# Altium PCB AX301_AX4010.PcbDoc (part 1 of 10)
Units mil, origin at the board's own origin, x right, y up, seen from the top; angles counter-clockwise.
Board outline 5185 x 3614 mil, 4 copper layers (Top Layer, GND, Mid-Layer 1, Bottom Layer); 191 components, 338 nets, 1108 pads, 420 vias.
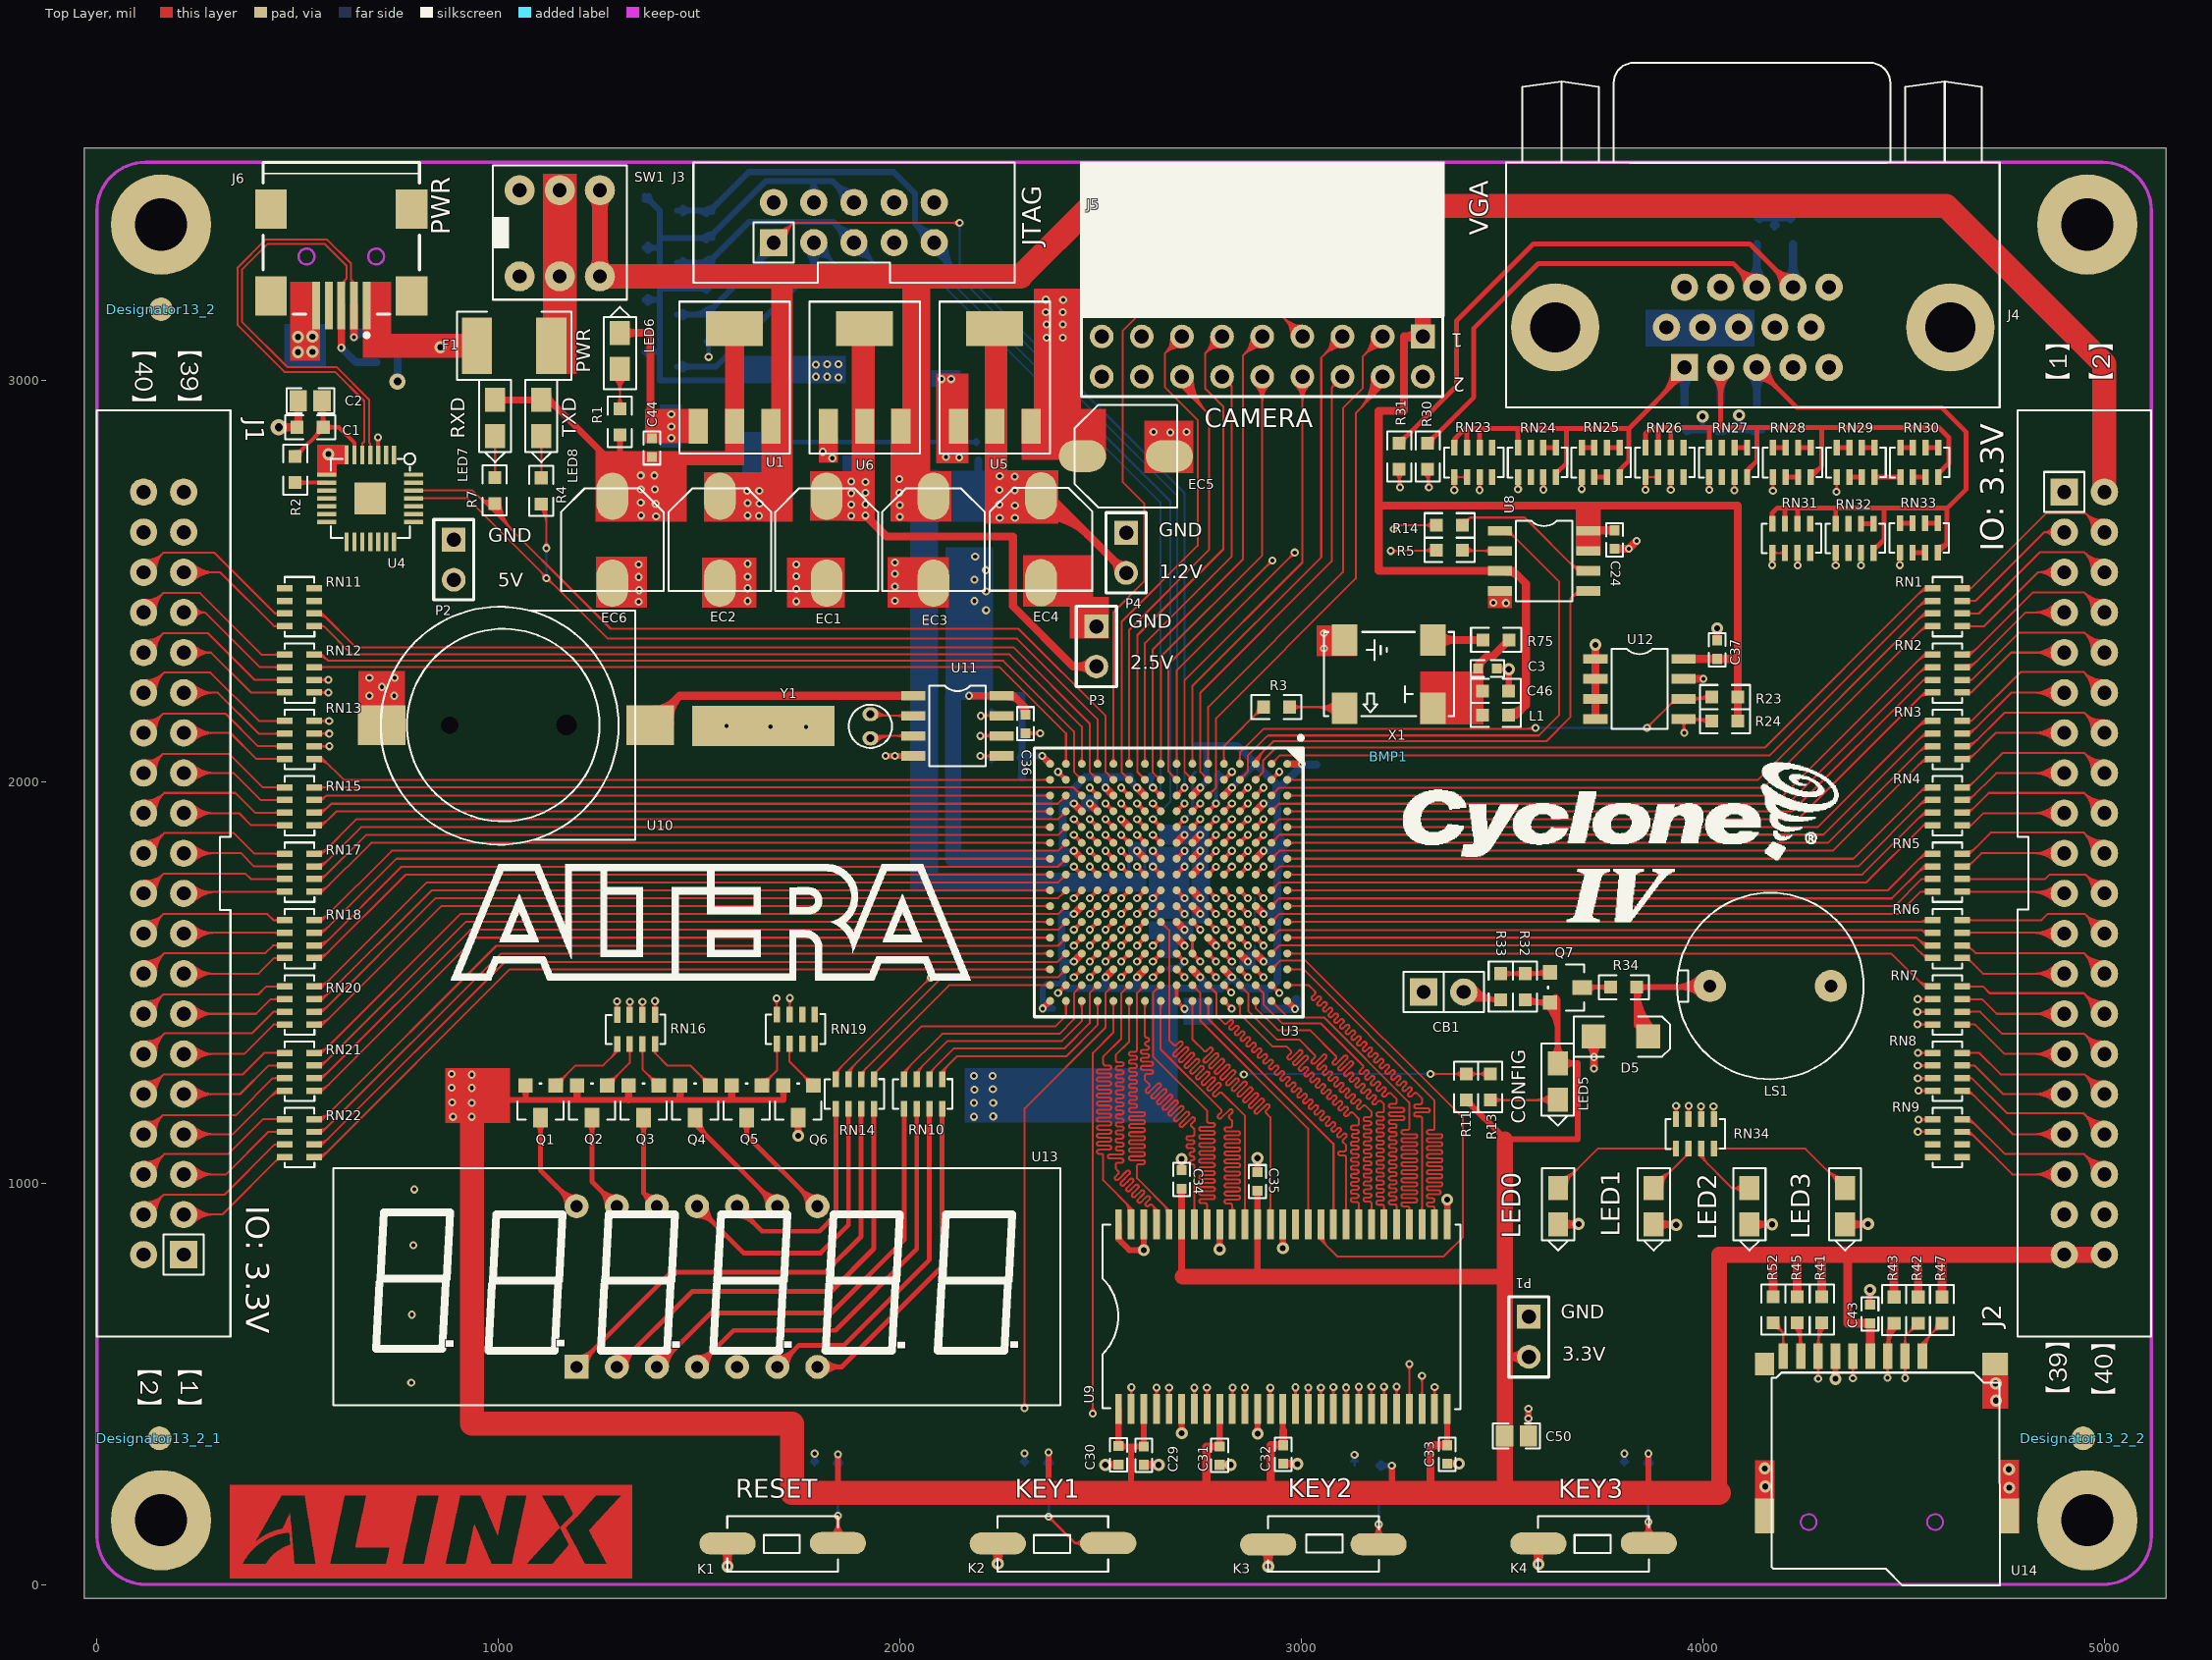
[diagram p0: Top Layer view]
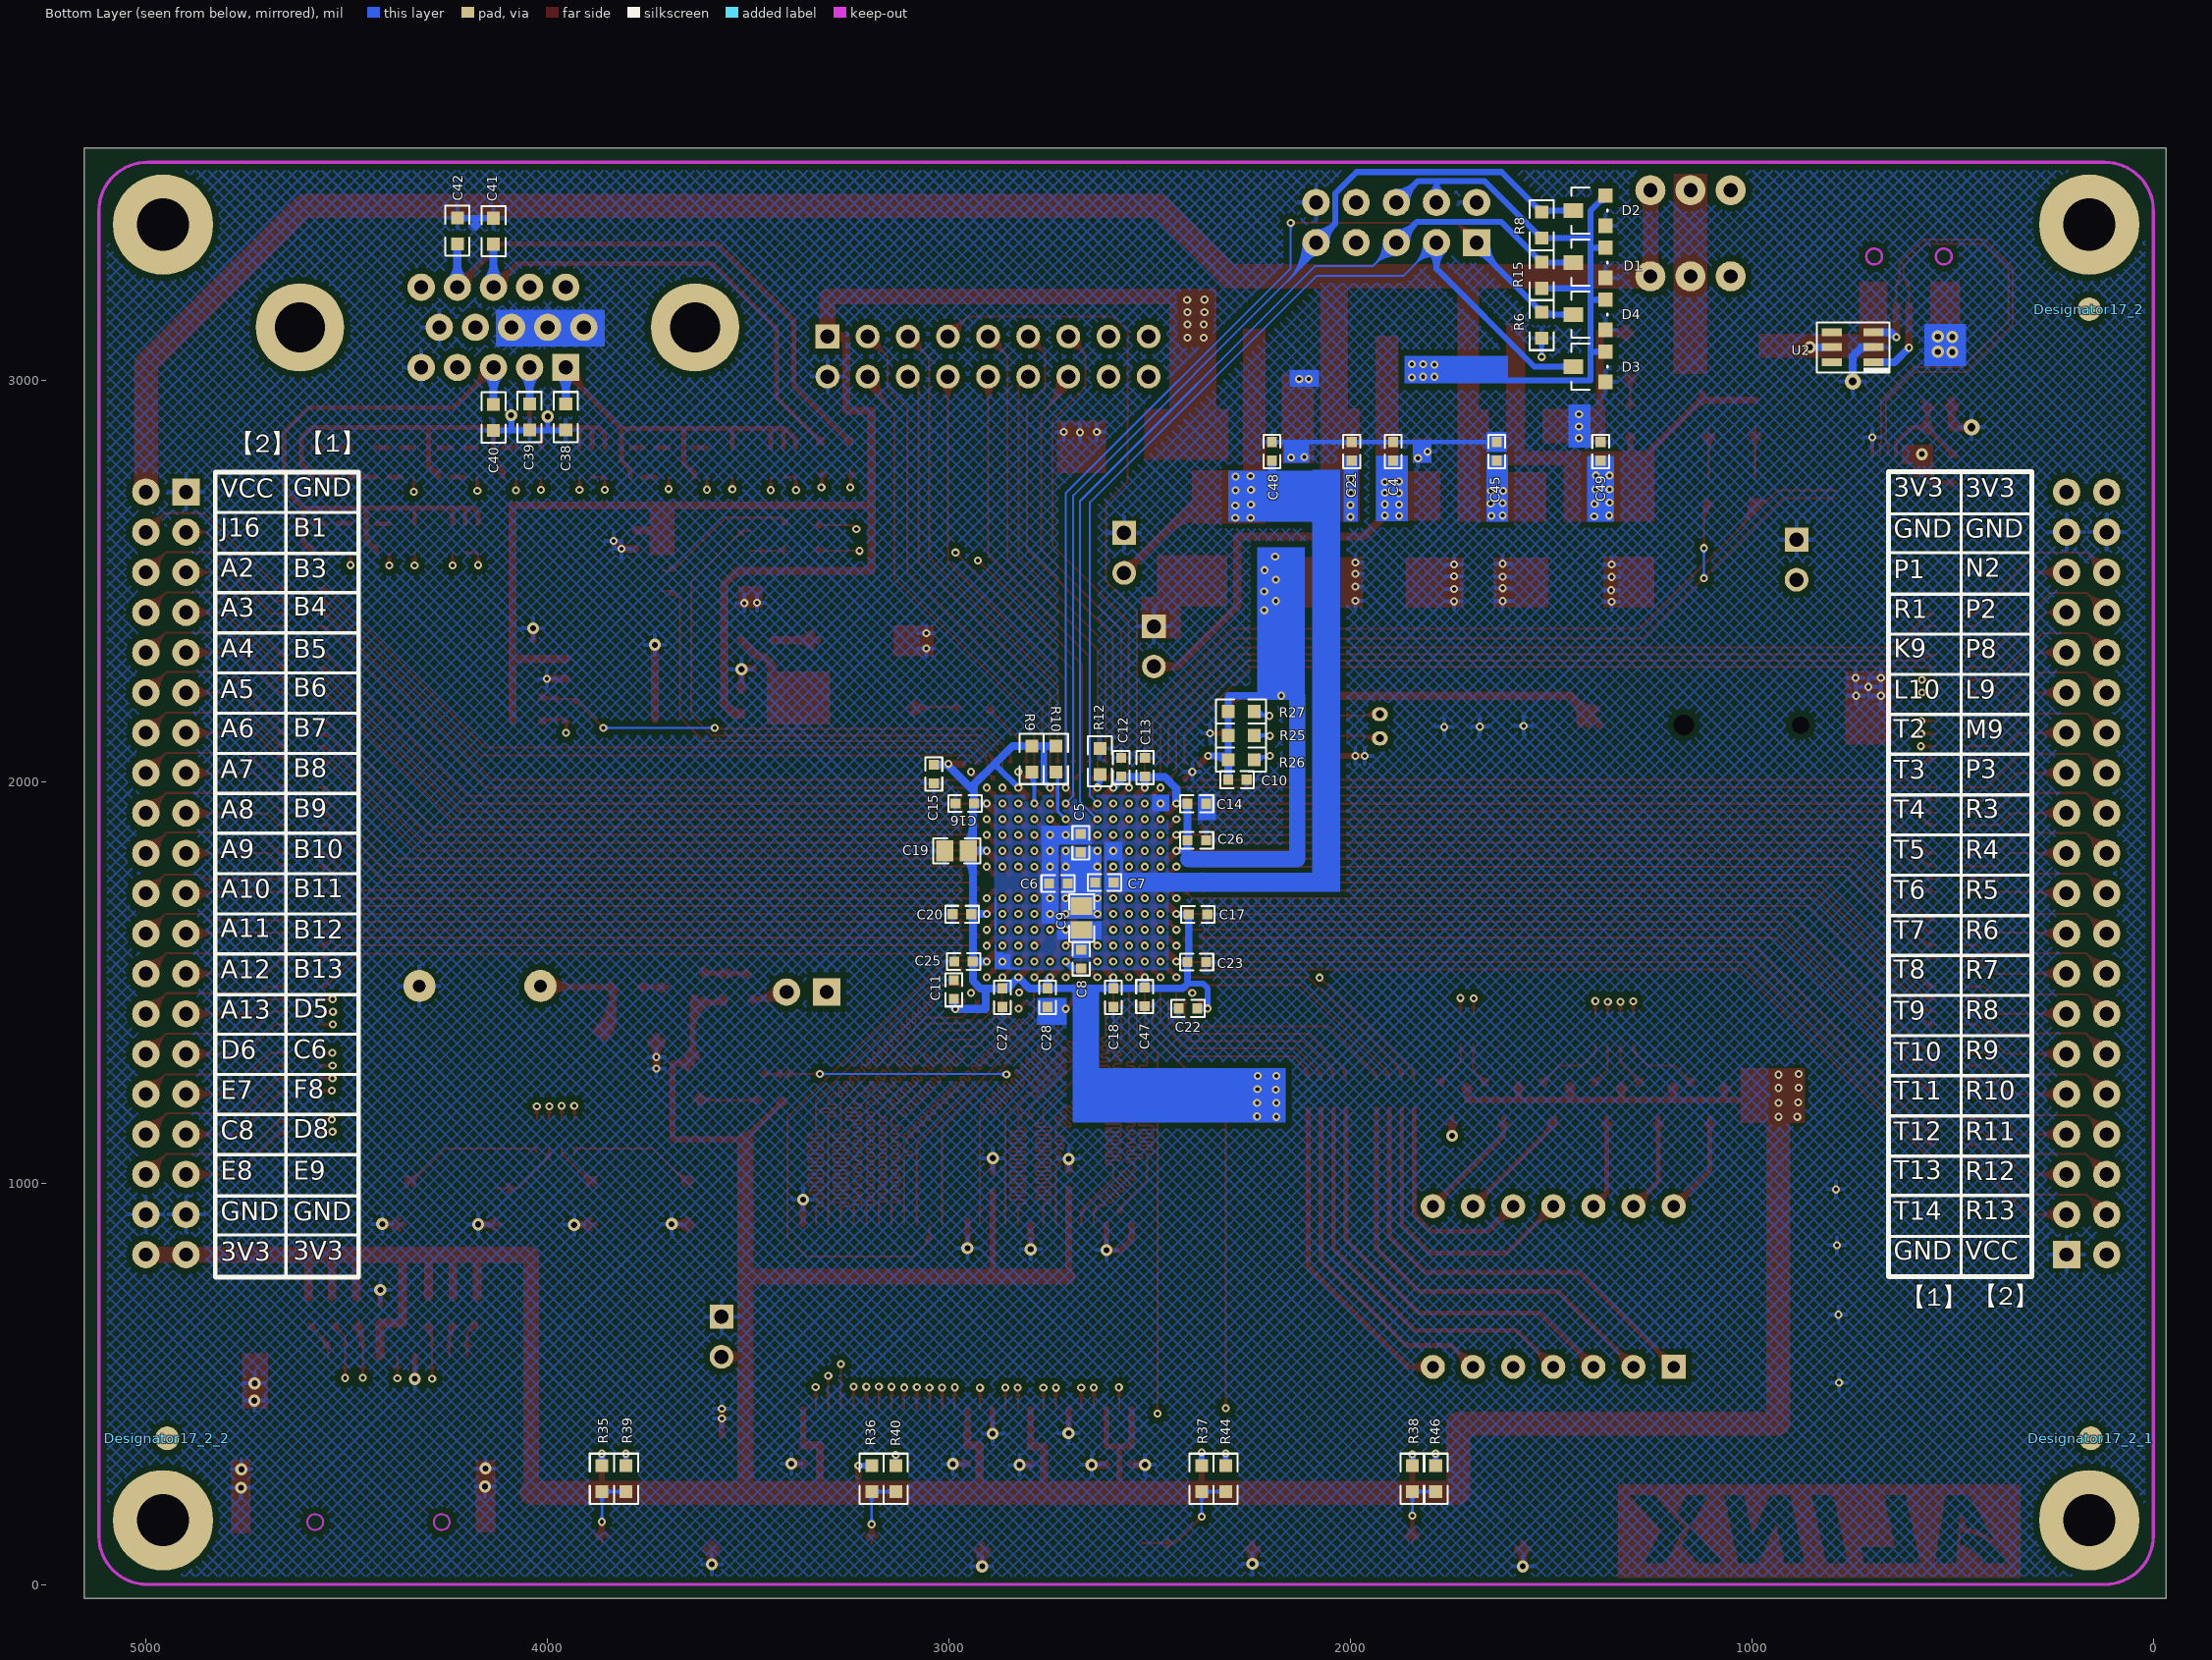
[diagram p1: Bottom Layer view, seen from below]
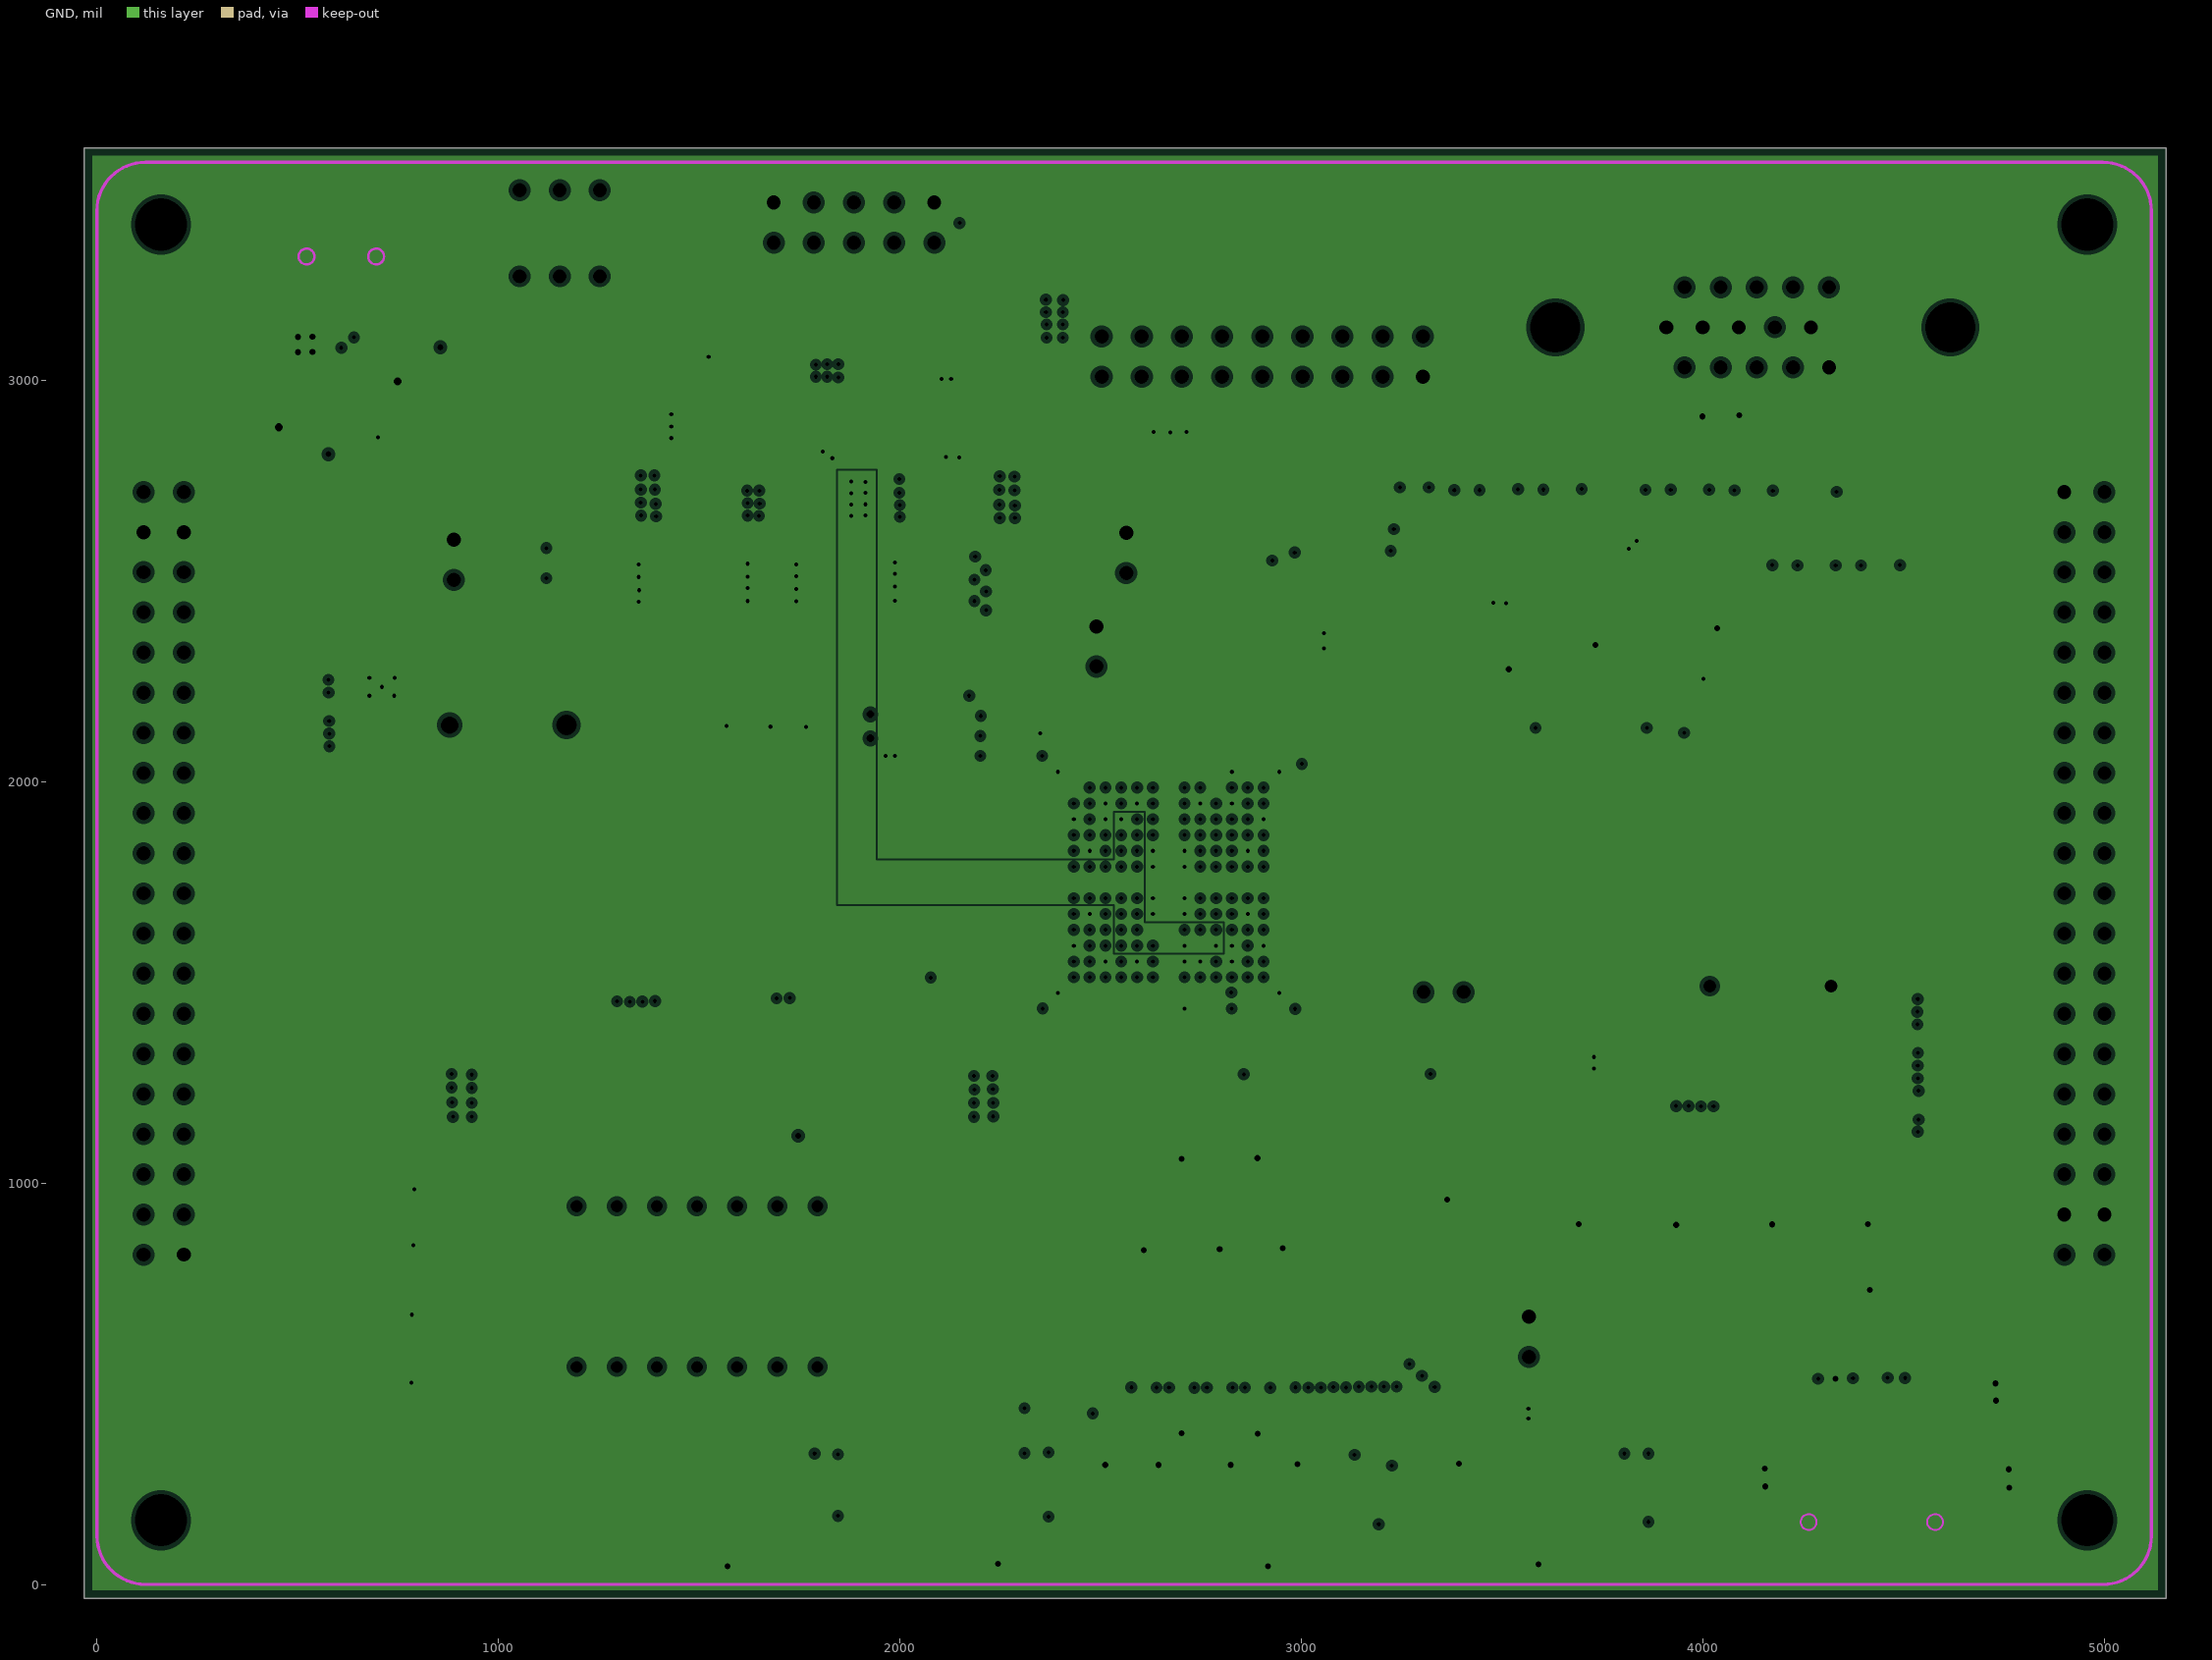
[diagram p2: GND, clearances drawn from the general rule]
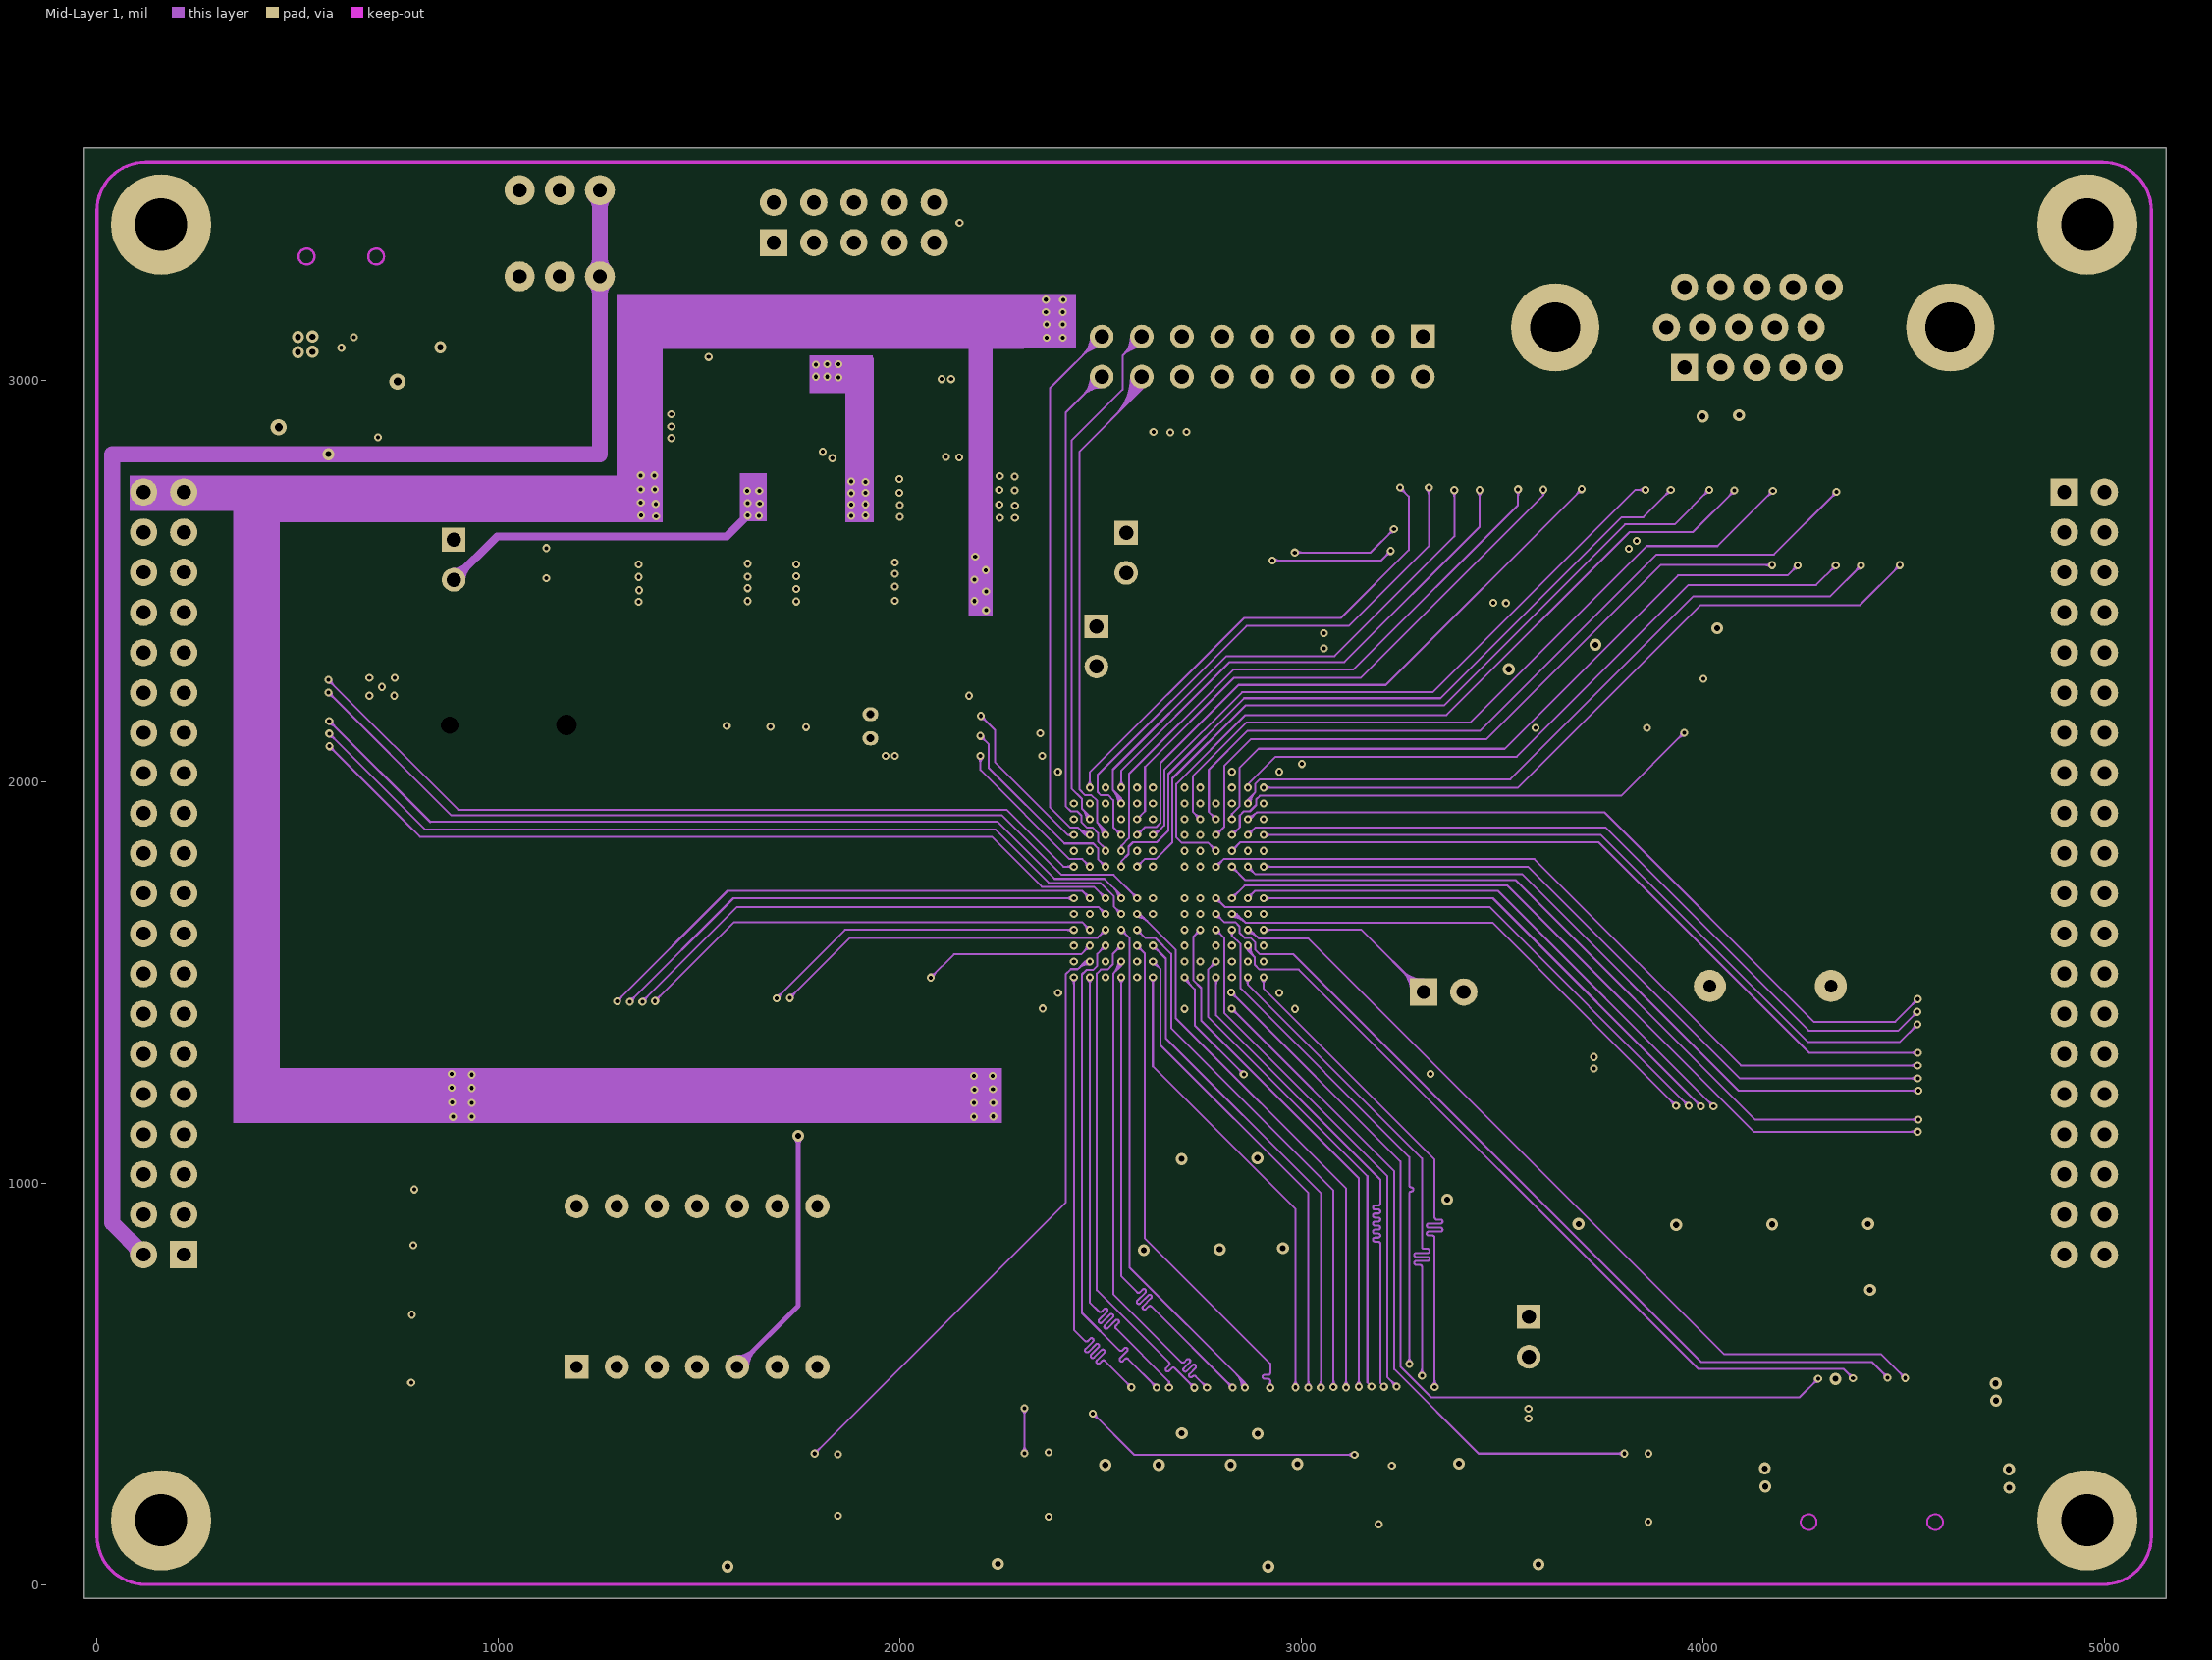
[diagram p3: Mid-Layer 1]

## Layer stack, top to bottom
Top Solder: solder mask 0.4, Solder Resist, Dk 3.5
Top Layer: signal copper 1.4
Dielectric1: core 12.6, FR-4, Dk 4.8
GND: plane copper 1.4, net (Multiple Nets)
Dielectric3: prepreg 12.6, FR-4, Dk 4.8
Mid-Layer 1: signal copper 1.4
Dielectric2: core 12.6, FR-4, Dk 4.8
Bottom Layer: signal copper 1.4
Bottom Solder: solder mask 0.4, Solder Resist, Dk 3.5

## Board outline
-31,3579.3 5154,3579.3 5154,3242.3 5154,-34.7 4892,-34.7 -31,-34.7 -31,3579.3

## Design rules (kind name [scope] priority, off if disabled: settings)
Clearance [All] p1: gap=5
ComponentClearance [All] p1 off: gap=10 collisioncheckmode=3 verticalgap=10 showdistances=FALSE
FanoutControl [InNet('GND')] p1: bgadir=Out bgaviamode=Centered fanoutstyle=Auto fanoutdirection=Alternating viagrid=1
FanoutControl Fanout_BGA [IsBGA] p2: bgadir=Out bgaviamode=Centered fanoutstyle=Auto fanoutdirection=Alternating viagrid=1 // Fanout_BGA (Default Rule)
FanoutControl Fanout_LCC [IsLCC] p3: bgadir=Out bgaviamode=Centered fanoutstyle=Auto fanoutdirection=Alternating viagrid=1 // Fanout_LCC (Default Rule)
FanoutControl Fanout_SOIC [IsSOIC] p4: bgadir=Out bgaviamode=Centered fanoutstyle=Auto fanoutdirection=Alternating viagrid=1 // Fanout_SOIC (Default Rule)
FanoutControl Fanout_Small [(CompPinCount < 5)] p5: bgadir=Out bgaviamode=Centered fanoutstyle=Auto fanoutdirection=OutThenIn viagrid=1 // Fanout_Small (Default Rule)
FanoutControl Fanout_Default [All] p6: bgadir=Out bgaviamode=Centered fanoutstyle=Auto fanoutdirection=Alternating viagrid=1 // Fanout_Default (Default Rule)
HoleSize [All] p1: absolutevalues=TRUE maxlimit=200 minlimit=1 maxpercent=80.000 minpercent=20.000
HoleToHoleClearance [All] p1 off: gap=10 allowstackedmicrovias=TRUE
LayerPairs [All] p1 off: enforce=TRUE
MatchedLengths SDRAM_DB [InNetClass('S_DB[0..15]')] p1: tolerance=50 checknetsindiffpair=TRUE checkdiffpairvsdiffpair=TRUE checkothers=TRUE
MatchedLengths SDRAM_A [InNetClass('S_A[0..12]')] p2: tolerance=50 checknetsindiffpair=TRUE checkdiffpairvsdiffpair=TRUE checkothers=TRUE
MinimumSolderMaskSliver [All] p1 off: minsoldermaskwidth=10
NetAntennae [All] p1 off: netantennaetolerance=0
PlaneClearance [All] p1: clearance=10
PlaneConnect [All] p1: planeconnectstyle=Relief reliefexpansion=6 reliefentries=4 reliefconductorwidth=5 reliefairgap=6
PolygonConnect [All] p1: connectstyle=Relief reliefconductorwidth=10 reliefentries=4 polygonreliefangle="90 Angle" airgapwidth=10
RoutingVias [All] p1: holewidth=10 width=20 viastyle="Through Hole" minholewidth=10 minwidth=20 maxholewidth=50 maxwidth=100
SilkToSilkClearance [All] p1 off: silktosilkclearance=10
SilkToSolderMaskClearance SilkscreenOverComponentPads [IsPad] p1 off: minsilkscreentomaskgap=10 clearancetoexposedcopper=TRUE
SolderMaskExpansion [All] p1: expansion=4
Width D2V5 [InNet('D2V5')] p1: maxlimit=60 minlimit=8 preferedwidth=20
Width D1V2 [InNet('D1V2')] p2: maxlimit=60 minlimit=6 preferedwidth=20
Width D3V3 [InNet('D3V3')] p3: maxlimit=60 minlimit=6 preferedwidth=20
Width GND [InNet('GND')] p4 off: maxlimit=60 minlimit=10 preferedwidth=20
Width [All] p5 off: maxlimit=60 minlimit=5 preferedwidth=5
15 further rules are at their usual default settings.

## Classes and differential pairs
net class S_DB[0..15]: S_DB0 S_DB1 S_DB2 S_DB3 S_DB4 S_DB5 S_DB6 S_DB7 S_DB8 S_DB9 S_DB10 S_DB11 S_DB12 S_DB13 S_DB14 S_DB15
net class S_A[0..12]: S_A0 S_A1 S_A2 S_A3 S_A4 S_A5 S_A6 S_A7 S_A8 S_A9 S_A10 S_A11 S_A12
component class 1_POWER: C1 C2 C4 C21 C44 C45 C48 C49 EC1 EC2 EC3 EC4 EC5 EC6 F1 J6 LED6 LED7 LED8 P1 P2 P3 P4 R1 R2 R4 R7 SW1 U1 U2 U4 U5 U6
component class 5_SDRAM: C29 C30 C31 C32 C33 C34 C35 C50 U9
component class 4_FPGA: C3 C5 C6 C7 C8 C9 C10 C11 C12 C13 C14 C15 C16 C17 C18 C19 C20 C22 C23 C24 C25 C26 C27 C28 C46 C47 D1 D2 D3 D4 J3 L1 LED5 R3 R5 R6 R8 R9 R10 R11 R12 R13 R14 R15 R75 U8 X1
component class 6_DIG: C36 C37 J2 LED0 LED1 LED2 LED3 Q1 Q2 Q3 Q4 Q5 Q6 R23 R24 R25 R26 R27 RN1 RN2 RN3 RN4 RN5 RN6 RN7 RN8 RN9 RN10 RN11 RN12 RN13 RN14 RN15 RN16 RN17 RN18 RN19 RN20 RN21 RN22 RN34 U10 U11 U12 U13 Y1
component class 7_VGA: C38 C39 C40 C41 C42 C43 CB1 D5 J4 J5 K1 K2 K3 K4 LS1 Q7 R30 R31 R32 R33 R34 R35 R36 R37 R38 R39 R40 R41 R42 R43 R44 R45 R46 R47 R52 RN23 RN24 RN25 RN26 RN27 RN28 RN29 RN30 RN31 RN32 RN33 U14
net class DIG[0..7]: DIG0 DIG1 DIG2 DIG3 DIG4 DIG5 DIG6 DIG7
net class SEL[0..5]: SEL0 SEL1 SEL2 SEL3 SEL4 SEL5
net class VGAD[15..0]: VGAD0 VGAD1 VGAD2 VGAD3 VGAD4 VGAD5 VGAD6 VGAD7 VGAD8 VGAD9 VGAD10 VGAD11 VGAD12 VGAD13 VGAD14 VGAD15
component class 2_FPGA: U3

## Components (designator, comment, footprint, x,y, rotation, side; value= is the part's Value field where it differs from the comment)
BMP1 "" BMP1 3217,2062 r0 top
C1 "1uF" 0603 564,2883 r180 top
C2 "10uF" 0805 561,2949 r180 top
C3 "0.1uF" 0402 3441,2282 r0 top
C4 "104" 0402 1894,2800 r90 bottom
C5 "10uF" 0805 2669.89,1631 r90 bottom
C6 "104" 0402 2590,1749 r0 bottom
C7 "104" 0402 2751,1746 r180 bottom
C8 "104" 0402 2671,1581 r270 bottom
C9 "104" 0402 2672,1870 r270 bottom
C10 "104" 0402 2305,2005 r180 bottom
C11 "104" 0402 2988,1459 r90 bottom
C12 "104" 0402 2571,2013 r90 bottom
C13 "104" 0402 2512,2013 r90 bottom
C14 "104" 0402 2406,1945 r180 bottom
C15 "104" 0402 3038,2042 r270 bottom
C16 "104" 0402 2938,1946 r0 bottom
C17 "104" 0402 2403,1669 r180 bottom
C18 "104" 0402 2591,1485 r270 bottom
C19 "10uF" 0805 2952,1827.74 r0 bottom
C20 "104" 0402 2945,1669.67 r0 bottom
C21 "104" 0402 1997,2800 r90 bottom
C22 "104" 0402 2382,1435 r0 bottom
C23 "104" 0402 2406,1551 r180 bottom
C24 "104" 0402 3781,2580 r90 top
C25 "104" 0402 2941,1552 r0 bottom
C26 "104" 0402 2406,1854 r180 bottom
C27 "104" 0402 2867,1485 r270 bottom
C28 "104" 0402 2755,1485 r270 bottom
C29 "104" 0402 2607.99,344.01 r270 top
C30 "104" 0402 2545,345 r270 top
C31 "104" 0402 2797,344 r270 top
C32 "104" 0402 2955,347 r270 top
C33 "104" 0402 3364,347 r270 top
C34 "104" 0402 2702,986 r90 top
C35 "104" 0402 2891,981 r90 top
C36 "104" 0402 2313,2167 r270 top
C37 "104" 0402 4036,2306 r90 top
C38 "5p1" 0603 3955,2941 r270 bottom
C39 "5p1" 0603 4045,2941 r270 bottom
C40 "5p1" 0603 4135,2940 r270 bottom
C41 "5p1" 0603 4135,3339 r90 bottom
C42 "5p1" 0603 4225,3340 r90 bottom
C43 "104" 0402 4417,651 r90 top
C44 "104" 0402 1383,2809 r90 top
C45 "104" 0402 1636,2800 r90 bottom
C46 "4.7uF" 0603 3452,2226 r0 top
C47 "104" 0402 2513,1487 r270 bottom
C48 "104" 0402 2196,2800 r90 bottom
C49 "104" 0402 1377,2800 r90 bottom
C50 "10uF" 0805 3507,370 r0 top
CB1 "BUZ" SIP2 3305,1476 r0 top
D1 "BAT54S" SOT23 1365,3255.33 r90 bottom
D2 "BAT54S" SOT23 1365,3385 r90 bottom
D3 "BAT54S" SOT23 1365,2996 r90 bottom
D4 "BAT54S" SOT23 1365,3125.67 r90 bottom
D5 "4148" 1206A 3729,1365 r0 top
Designator13_2 "Comment" TPS 160,3177 r0 top
Designator13_2_1 "Comment" TPS 156,364 r0 top
Designator13_2_2 "Comment" TPS 4948,364 r0 top
Designator17_2 "Comment" TPS 160,3177 r180 bottom
Designator17_2_1 "Comment" TPS 156,364 r180 bottom
Designator17_2_2 "Comment" TPS 4948,364 r180 bottom
EC1 "100uF/16V" AEC6.5 1818,2711 r270 top
EC2 "100uF/16V" AEC6.5 1552,2711 r270 top
EC3 "100uF/16V" AEC6.5 2084,2711 r270 top
EC4 "100uF/16V" AEC6.5 2352,2712 r270 top
EC5 "100uF/16V" AEC6.5 2455,2811 r0 top
EC6 "100uF/16V" AEC6.5 1284,2711 r270 top
F1 "Fuse" 1812 947,3086 r0 top
J1 "IDC40" IDC-40J 166.35,1771.65 r90 top (schematic designator J6)
J2 "IDC40" IDC-40J 4951,1771.65 r270 top
J3 "JTAG" JTAG-10 1686,3343 r0 top
J4 "VGA" VGA 3955,3032 r90 top
J5 "Header 9X2" HDR2X9 3303,3109.17 r180 top locked
J6 "EC2" MINIUSBB 609,3186.3 r270 top (schematic designator J1)
K1 "RESET" KEY735SO 1846,103 r180 top
K2 "KEY1" KEY735SO 2519.33,103 r180 top
K3 "KEY2" KEY735SO 2917.67,99.2 r0 top
K4 "KEY3" KEY735SO 3866,103 r180 top
L1 "Bead" 0603 3517,2166 r180 top
LED0 "LED0" LEDSO 3640,897 r90 top
LED1 "LED1" LEDso 3878.33,897 r90 top
LED2 "LED2" LEDSO 4116.67,897 r90 top
LED3 "LED3" LEDSO 4355,897 r90 top
LED5 "CONFIG" LEDSO 3639,1208 r90 top
LED6 "D3V3" LEDSO 1303,3118 r270 top
LED7 "RXD" LEDSO 992,2861 r90 top
LED8 "TXD" LEDSO 1107,2861 r90 top
LS1 "BUZZER" BUZZER 4018,1491 r0 top
P1 "3.3V" HDR1X2 3567,667 r270 top
P2 "5V" HDR1X2 889,2603 r270 top
P3 "3.3V" HDR1X2 2490,2387 r270 top
P4 "1.2V" HDR1X2 2564,2620 r270 top
Q1 "9012" SOT23 1143,1243 r180 top
Q2 "9012" SOT23 1271.4,1243 r180 top
Q3 "9012" SOT23 1399.8,1243 r180 top
Q4 "9012" SOT23 1528.2,1243 r180 top
Q5 "9012" SOT23 1656.6,1243 r180 top
Q6 "9012" SOT23 1785,1243 r180 top
Q7 "9012" SOT23 3620,1525 r270 top
R1 "1K" 0603 1303,2864 r90 top
R2 "10k" 0603 494,2745 r90 top
R3 "33R" 0603 2906,2186 r0 top
R4 "1K" 0603 1107,2692 r90 top
R5 "49.9" 0603 3337,2577 r0 top
R6 "1K" 0603 1524,3105 r90 bottom
R7 "1K" 0603 991,2693 r90 top
R8 "10K" 0603 1524,3354 r90 bottom
R9 "10K" 0603 2794,2089 r270 bottom
R10 "10K" 0603 2734,2089 r270 bottom
R11 "10K" 0603 3411,1207 r90 top
R12 "10K" 0603 2624,2018 r90 bottom
R13 "10K" 0603 3471,1272 r270 top
R14 "24.9" 0603 3337,2639 r0 top
R15 "10K" 0603 1524,3229 r90 bottom
R23 "4k7" 0603 4088,2211 r180 top
R24 "4k7" 0603 4088,2151 r180 top
R25 "10k" 0603 2305,2115 r180 bottom
R26 "10k" 0603 2305,2055 r180 bottom
R27 "10k" 0603 2305,2175 r180 bottom
R30 "22" 0603 3315,2843 r270 top
R31 "22" 0603 3244,2843 r270 top
R32 "1K" 0603 3558,1457 r90 top
R33 "2K2" 0603 3497,1457 r90 top
R34 "15" 0603 3771,1488 r0 top
R35 "10k" 0603 3865,296 r270 bottom
R36 "10k" 0603 3193,296 r270 bottom
R37 "10k" 0603 2371,296 r270 bottom
R38 "10k" 0603 1846,296 r270 bottom
R39 "100" 0603 3805,296 r270 bottom
R40 "100" 0603 3133,296 r270 bottom
R41 "1K" 0603 4297,717 r270 top
R42 "1K" 0603 4537,716 r270 top
R43 "1K" 0603 4477,716 r270 top
R44 "100" 0603 2311,296 r270 bottom
R45 "1K" 0603 4236,717 r270 top
R46 "100" 0603 1788,296 r270 bottom
R47 "1K" 0603 4596,716 r270 top
R52 "1K" 0603 4176,717 r270 top
R75 "10k" 0603 3453,2353 r0 top
RN1 "33R" RN-8P 4573,2482 r0 top
RN2 "33R" RN-8P 4573,2316.62 r0 top
RN3 "33R" RN-8P 4573,2151.25 r0 top
RN4 "33R" RN-8P 4573,1985.88 r0 top
RN5 "33R" RN-8P 4573,1820.5 r0 top
RN6 "33R" RN-8P 4573,1655.12 r0 top
RN7 "33R" RN-8P 4573,1489.75 r0 top
RN8 "33R" RN-8P 4573,1324.38 r0 top
RN9 "33R" RN-8P 4573,1159 r0 top
RN10 "470" RN-8P 2011,1185 r90 top
RN11 "33R" RN-8P 468,2482 r0 top
RN12 "33R" RN-8P 468,2316.62 r0 top
RN13 "33R" RN-8P 468,2151.25 r0 top
RN14 "470" RN-8P 1841,1185 r90 top
RN15 "33R" RN-8P 468,1985.88 r0 top
RN16 "470" RN-8P 1296,1346 r90 top
RN17 "33R" RN-8P 468,1820.5 r0 top
RN18 "33R" RN-8P 468,1655.12 r0 top
RN19 "470" RN-8P 1694,1347 r90 top
RN20 "33R" RN-8P 468,1489.75 r0 top
RN21 "33R" RN-8P 468,1324.38 r0 top
RN22 "33R" RN-8P 468,1159 r0 top
RN23 "1K" RN-8P 3476,2832 r270 top
RN24 "2K" RN-8P 3634.71,2832 r270 top
RN25 "2K" RN-8P 3793.43,2832 r270 top
RN26 "1K" RN-8P 3952.14,2832 r270 top
RN27 "2K" RN-8P 4110.86,2832 r270 top
RN28 "2K" RN-8P 4269.57,2832 r270 top
RN29 "2K" RN-8P 4428.29,2832 r270 top
RN30 "2K" RN-8P 4587,2832 r270 top
RN31 "1K" RN-8P 4268,2643 r270 top
RN32 "2K" RN-8P 4426,2643 r270 top
RN33 "2K" RN-8P 4586,2644 r270 top
RN34 "470" RN-8P 4028,1159 r270 top
SW1 "SW" KEY_DPDT 1053,3259 r90 top
U1 "1117-3.3" SOT223 1498,2885 r0 top
U2 "SRV05-4" SOT23-6 697,3045 r90 bottom
U3 "EP4CE6F17C8" FBGA256 2670,1749 r270 top locked
U4 "CP2102" QFN28 740,2814 r270 top
U5 "1117-1.2" SOT223 2146,2885 r0 top
U6 "1117-2.5" SOT223 1822,2885 r0 top
U8 "M25P16-VMN3PB" SO8 3495,2625 r0 top
U9 "HY57V2562GTR" TSOP-54 2545,437 r180 top
U10 "battery" BATSO 1418,2141 r0 top
U11 "DS1302" SO8 2034,2214 r0 top
U12 "24LC04" SO8 3733,2306 r0 top
U13 "HEX6" NIX_6 1195,542 r0 top locked
U14 "SD" TF 4459,370 r90 top locked
X1 "50M" CY_4 3328,2183 r0 top
Y1 "32.768kHz" CY_SMALL 1927,2168 r270 top

## Footprints (in the part's own frame and the unit in brackets; to place one, negate y for a bottom-side part, rotate by r counter-clockwise, add the part's x,y. Pads: shape width x height; smd on the part's side, far side on the other; paste and mask are expansions set on the pad)
0402 [mil]
  rect 25x25 smd: 1(0,0) 2(46.24,0)
  silkscreen extent -19,-21 64,21
0603 [mil]
  rect 32x32 smd: 1(0,0) 2(65,0)
  silkscreen extent -30,-30 95,30
0805 [mm]
  rect 1.1x1.36 smd: 1(0,0) 2(1.5,0)
  silkscreen extent -0.76,-0.79 2.24,0.79
1206A [mil]
  rect 60x60 smd: 1(0,0) 2(135,0)
  silkscreen extent -50,-50 190,50
1812 [mil]
  rect 75x140 smd: 1(0,0) 2(185,0)
  silkscreen extent -50,-85 235,85
AEC6.5 [mm]
  oval 3x2 smd: 1(0,0) 2(5.5,0)
  silkscreen extent -0.5,-3.25 6,3.25
BATSO [mm]
  round 1 hole 1.1: 0(-13.7,0)
  round 1 hole 1.3: 0(-6.3,0)
  rect 3x2.5 smd: 1(-1,0) 2(-18,0)
  silkscreen extent -18.06,-7.57 -1.95,7.48
BMP1 [mil]
  silkscreen extent 38,-410 1122,-14
BUZZER [mil]
  round 80 hole 32: 1(0,0) 2(301.57,0)
  silkscreen extent -81,-232 383,232
CY_4 [mm]
  rect 1.6x2 smd: 1(0,4.318) 2(-5.588,4.318) 3(-5.588,0) 4(0,0)
  silkscreen extent -6.88,-0.51 1.35,4.83
CY_SMALL [mil]
  rect 100x354.33 smd: 0(29,-267)
  oval 35x40 hole 20: 1(0,0) 2(60,0)
  silkscreen extent -24,-54 84,54
FBGA256 [mm] "BGA, 256-Leads, Body 17x17mm, Pitch 1mm"
  round 0.5 smd: A1(-7.5,7.5) A2(-6.5,7.5) A3(-5.5,7.5) A4(-4.5,7.5) A5(-3.5,7.5) A6(-2.5,7.5) A7(-1.5,7.5) A8(-0.5,7.5) A9(0.5,7.5) A10(1.5,7.5) A11(2.5,7.5) A12(3.5,7.5) A13(4.5,7.5) A14(5.5,7.5) A15(6.5,7.5) A16(7.5,7.5) B1(-7.5,6.5) B2(-6.5,6.5) B3(-5.5,6.5) B4(-4.5,6.5) B5(-3.5,6.5) B6(-2.5,6.5) B7(-1.5,6.5) B8(-0.5,6.5) B9(0.5,6.5) B10(1.5,6.5) B11(2.5,6.5) B12(3.5,6.5) B13(4.5,6.5) B14(5.5,6.5) B15(6.5,6.5) B16(7.5,6.5) C1(-7.5,5.5) C2(-6.5,5.5) C3(-5.5,5.5) C4(-4.5,5.5) C5(-3.5,5.5) C6(-2.5,5.5) C7(-1.5,5.5) C8(-0.5,5.5) C9(0.5,5.5) C10(1.5,5.5) C11(2.5,5.5) C12(3.5,5.5) C13(4.5,5.5) C14(5.5,5.5) C15(6.5,5.5) C16(7.5,5.5) D1(-7.5,4.5) D2(-6.5,4.5) D3(-5.5,4.5) D4(-4.5,4.5) D5(-3.5,4.5) D6(-2.5,4.5) D7(-1.5,4.5) D8(-0.5,4.5) D9(0.5,4.5) D10(1.5,4.5) D11(2.5,4.5) D12(3.5,4.5) D13(4.5,4.5) D14(5.5,4.5) D15(6.5,4.5) D16(7.5,4.5) E1(-7.5,3.5) E2(-6.5,3.5) E3(-5.5,3.5) E4(-4.5,3.5) E5(-3.5,3.5) E6(-2.5,3.5) E7(-1.5,3.5) E8(-0.5,3.5) E9(0.5,3.5) E10(1.5,3.5) E11(2.5,3.5) E12(3.5,3.5) E13(4.5,3.5) E14(5.5,3.5) E15(6.5,3.5) E16(7.5,3.5) F1(-7.5,2.5) F2(-6.5,2.5) F3(-5.5,2.5) F4(-4.5,2.5) F5(-3.5,2.5) F6(-2.5,2.5) F7(-1.5,2.5) F8(-0.5,2.5) F9(0.5,2.5) F10(1.5,2.5) F11(2.5,2.5) F12(3.5,2.5) F13(4.5,2.5) F14(5.5,2.5) F15(6.5,2.5) F16(7.5,2.5) G1(-7.5,1.5) G2(-6.5,1.5) G3(-5.5,1.5) G4(-4.5,1.5) G5(-3.5,1.5) G6(-2.5,1.5) G7(-1.5,1.5) G8(-0.5,1.5) G9(0.5,1.5) G10(1.5,1.5) G11(2.5,1.5) G12(3.5,1.5) G13(4.5,1.5) G14(5.5,1.5) G15(6.5,1.5) G16(7.5,1.5) H1(-7.5,0.5) H2(-6.5,0.5) H3(-5.5,0.5) H4(-4.5,0.5) H5(-3.5,0.5) H6(-2.5,0.5) H7(-1.5,0.5) H8(-0.5,0.5) H9(0.5,0.5) H10(1.5,0.5) H11(2.5,0.5) H12(3.5,0.5) H13(4.5,0.5) H14(5.5,0.5) H15(6.5,0.5) H16(7.5,0.5) J1(-7.5,-0.5) J2(-6.5,-0.5) J3(-5.5,-0.5) J4(-4.5,-0.5) J5(-3.5,-0.5) J6(-2.5,-0.5) J7(-1.5,-0.5) J8(-0.5,-0.5) J9(0.5,-0.5) J10(1.5,-0.5) J11(2.5,-0.5) J12(3.5,-0.5) J13(4.5,-0.5) J14(5.5,-0.5) J15(6.5,-0.5) J16(7.5,-0.5) K1(-7.5,-1.5) K2(-6.5,-1.5) K3(-5.5,-1.5) K4(-4.5,-1.5) K5(-3.5,-1.5) K6(-2.5,-1.5) K7(-1.5,-1.5) K8(-0.5,-1.5) K9(0.5,-1.5) K10(1.5,-1.5) K11(2.5,-1.5) K12(3.5,-1.5) K13(4.5,-1.5) K14(5.5,-1.5) K15(6.5,-1.5) K16(7.5,-1.5) L1(-7.5,-2.5) L2(-6.5,-2.5) L3(-5.5,-2.5) L4(-4.5,-2.5) L5(-3.5,-2.5) L6(-2.5,-2.5) L7(-1.5,-2.5) L8(-0.5,-2.5) L9(0.5,-2.5) L10(1.5,-2.5) L11(2.5,-2.5) L12(3.5,-2.5) L13(4.5,-2.5) L14(5.5,-2.5) L15(6.5,-2.5) L16(7.5,-2.5) M1(-7.5,-3.5) M2(-6.5,-3.5) M3(-5.5,-3.5) M4(-4.5,-3.5) M5(-3.5,-3.5) M6(-2.5,-3.5) M7(-1.5,-3.5) M8(-0.5,-3.5) M9(0.5,-3.5) M10(1.5,-3.5) M11(2.5,-3.5) M12(3.5,-3.5) M13(4.5,-3.5) M14(5.5,-3.5) M15(6.5,-3.5) M16(7.5,-3.5) N1(-7.5,-4.5) N2(-6.5,-4.5) N3(-5.5,-4.5) N4(-4.5,-4.5) N5(-3.5,-4.5) N6(-2.5,-4.5) N7(-1.5,-4.5) N8(-0.5,-4.5) N9(0.5,-4.5) N10(1.5,-4.5) N11(2.5,-4.5) N12(3.5,-4.5) N13(4.5,-4.5) N14(5.5,-4.5) N15(6.5,-4.5) N16(7.5,-4.5) P1(-7.5,-5.5) P2(-6.5,-5.5) P3(-5.5,-5.5) P4(-4.5,-5.5) P5(-3.5,-5.5) P6(-2.5,-5.5) P7(-1.5,-5.5) P8(-0.5,-5.5) P9(0.5,-5.5) P10(1.5,-5.5) P11(2.5,-5.5) P12(3.5,-5.5) P13(4.5,-5.5) P14(5.5,-5.5) P15(6.5,-5.5) P16(7.5,-5.5) R1(-7.5,-6.5) R2(-6.5,-6.5) R3(-5.5,-6.5) R4(-4.5,-6.5) R5(-3.5,-6.5) R6(-2.5,-6.5) R7(-1.5,-6.5) R8(-0.5,-6.5) R9(0.5,-6.5) R10(1.5,-6.5) R11(2.5,-6.5) R12(3.5,-6.5) R13(4.5,-6.5) R14(5.5,-6.5) R15(6.5,-6.5) R16(7.5,-6.5) T1(-7.5,-7.5) T2(-6.5,-7.5) T3(-5.5,-7.5) T4(-4.5,-7.5) T5(-3.5,-7.5) T6(-2.5,-7.5) T7(-1.5,-7.5) T8(-0.5,-7.5) T9(0.5,-7.5) T10(1.5,-7.5) T11(2.5,-7.5) T12(3.5,-7.5) T13(4.5,-7.5) T14(5.5,-7.5) T15(6.5,-7.5) T16(7.5,-7.5)
  silkscreen extent -9.27,-8.5 8.5,8.5, body extent -8.5,-8.5 8.5,8.5, height 2.2
HDR1X2 [mm] "Connector; Header; 2 Position"
  rect 1.5x1.5 hole 0.9: 1(0,0)
  round 1.5 hole 0.9: 2(2.54,0)
  silkscreen extent -1.27,-1.27 3.81,1.27
HDR2X9 [mm] "Connector; Header; 9x2 Position"
  rect 1.5x1.5 hole 0.9: 1(0,0)
  round 1.5 hole 0.9: 2(0,2.54) 3(2.54,0) 4(2.54,2.54) 5(5.08,0) 6(5.08,2.54) 7(7.62,0) 8(7.62,2.54) 9(10.16,0) 10(10.16,2.54) 11(12.7,0) 12(12.7,2.54) 13(15.24,0) 14(15.24,2.54) 15(17.78,0) 16(17.78,2.54) 17(20.32,0) 18(20.32,2.54)
  silkscreen extent -1.27,-1.27 21.59,3.81
IDC-40J [mil]
  rect 68x68 hole 35: 1(-950,-50)
  round 68 hole 35: 2(-950,50) 3(-850,-50) 4(-850,50) 5(-750,-50) 6(-750,50) 7(-650,-50) 8(-650,50) 9(-550,-50) 10(-550,50) 11(-450,-50) 12(-450,50) 13(-350,-50) 14(-350,50) 15(-250,-50) 16(-250,50) 17(-150,-50) 18(-150,50) 19(-50,-50) 20(-50,50) 21(50,-50) 22(50,50) 23(150,-50) 24(150,50) 25(250,-50) 26(250,50) 27(350,-50) 28(350,50) 29(450,-50) 30(450,50) 31(550,-50) 32(550,50) 33(650,-50) 34(650,50) 35(750,-50) 36(750,50) 37(850,-50) 38(850,50) 39(950,-50) 40(950,50)
  silkscreen extent -1154,-167 1154,167
JTAG-10 [mil]
  rect 68x68 hole 35: 1(0,0)
  round 68 hole 35: 2(0,100) 3(100,0) 4(100,100) 5(200,0) 6(200,100) 7(300,0) 8(300,100) 9(400,0) 10(400,100)
  silkscreen extent -200,-100 600,200
KEY735SO [mil]
  oval 140x55.12 smd: 1(0,0) 2(275,1)
  silkscreen extent 0,-67 276,71
KEY_DPDT [mil]
  round 75 hole 35: 1(0,0) 2(0,-100) 3(0,-200) 4(214.57,0) 5(214.57,-100) 6(214.57,-200)
  silkscreen extent -58,-268 277,68
LEDSO [mil]
  rect 60x50 smd: 1(90,0) 2(0,0)
  silkscreen extent -65,-40 140,40
LEDso [mil]
  rect 60x50 smd: 1(90,0) 2(0,0)
  silkscreen extent -65,-40 140,40
MINIUSBB [mm]
  rect 3x0.5 smd: 1(0,1.6) 2(0,0.8) 3(0,0) 4(0,-0.8) 5(0,-1.6)
  rect 2.5x2 smd: 6(-0.6,-4.45) 7(-6.1,-4.45) 8(-0.6,4.45) 9(-6.1,4.45)
  Keep-Out Layer circle w0.152: c-3.1,2.2 r0.5
  Keep-Out Layer circle w0.152: c-3.1,-2.2 r0.5
  silkscreen extent -9.05,-4.95 2,4.95
NIX_6 [mil]
  rect 60x60 hole 30: 1(0,0)
  round 60 hole 30: 2(100,0) 3(200,0) 4(300,0) 5(400,0) 6(500,0) 7(600,0) 8(600,400) 9(500,400) 10(400,400) 11(300,400) 12(200,400) 13(100,400) 14(0,400)
  silkscreen extent -606,-95 1206,495
QFN28 [mm]
  rect 2x2 smd: 0(2.75,-1.5)
  rect 1.2x0.27 smd: 1(0,0) 2(0,-0.5) 3(0,-1) 4(0,-1.5) 5(0,-2) 6(0,-2.5) 7(0,-3) 15(5.5,-3) 16(5.5,-2.5) 17(5.5,-2) 18(5.5,-1.5) 19(5.5,-1) 20(5.5,-0.5) 21(5.5,0)
  rect 0.27x1.2 smd: 8(1.25,-4.25) 9(1.75,-4.25) 10(2.25,-4.25) 11(2.75,-4.25) 12(3.25,-4.25) 13(3.75,-4.25) 14(4.25,-4.25) 22(4.25,1.25) 23(3.75,1.25) 24(3.25,1.25) 25(2.75,1.25) 26(2.25,1.25) 27(1.75,1.25) 28(1.25,1.25)
  silkscreen extent -0.1,-4 5.25,1.35
RN-8P [mm]
  rect 1x0.4 smd: 1(0,0) 2(0,-0.8) 3(0,-1.6) 4(0,-2.4) 5(1.858,-2.4) 6(1.858,-1.6) 7(1.858,-0.8) 8(1.858,0)
  silkscreen extent 0,-3.05 1.88,0.71
SIP2 [mil]
  rect 68x68 hole 35: 1(0,0)
  round 68 hole 35: 2(100,0)
  silkscreen extent -50,-50 150,50
SO8 [mil]
  rect 60x24 smd: 1(0,0) 2(0,-50) 3(0,-100) 4(0,-150) 5(220,-150) 6(220,-100) 7(220,-50) 8(220,0)
  silkscreen extent 40,-175 180,25
SOT23 [mil]
  rect 36x36 smd: 1(0,0) 2(75,0)
  rect 36x50 smd: 3(38,80)
  silkscreen extent -20,-5 95,85
SOT23-6 [mm]
  rect 0.5x1.27 smd: 1(0,0) 2(0.95,0) 3(1.905,0) 4(1.905,2.642) 5(0.95,2.642) 6(0,2.642)
  silkscreen extent -0.66,-0.99 2.51,3.61
SOT223 [mm]
  rect 1.2x2.2 smd: 1(0,0) 2(2.3,0) 3(4.6,0)
  rect 3.6x2.2 smd: 4(2.3,6.2)
  silkscreen extent -1.2,-1.7 5.8,7.9
TF [mm]
  rect 1.6x0.6 smd: 1(5.05,-2.25) 2(5.05,-1.15) 3(5.05,-0.05) 4(5.05,1.05) 5(5.05,2.15) 6(5.05,3.25) 7(5.05,4.35) 8(5.05,5.45) 9(5.05,6.55)
  rect 1.4x1.2 smd: 10(4.55,7.75)
  rect 2.2x1.2 smd: 11(-5.05,7.75) 12(-5.05,-7.75)
  rect 1.4x1.6 smd: 13(4.55,-6.85)
  Keep-Out Layer circle w0.127: c-5.45,4.951 r0.5
  Keep-Out Layer circle w0.127: c-5.45,-3.05 r0.5
  silkscreen extent -9.47,-7.15 4.01,7.29
TPS [mm]
  round 1.5 smd mask+0.5: 1(0,0)
TSOP-54 [mil]
  rect 17x75 smd: 1(0,0) 2(-31.5,0) 3(-62.99,0) 4(-94.49,0) 5(-125.98,0) 6(-157.48,0) 7(-188.98,0) 8(-220.47,0) 9(-251.97,0) 10(-283.46,0) 11(-314.99,0) 12(-346.46,0) 13(-377.95,0) 14(-409.45,0) 15(-440.94,0) 16(-472.44,0) 17(-503.94,0) 18(-535.43,0) 19(-566.93,0) 20(-598.43,0) 21(-629.92,0) 22(-661.42,0) 23(-692.91,0) 24(-724.41,0) 25(-755.91,0) 26(-787.4,0) 27(-818.9,0) 28(-818.9,-460) 29(-787.4,-460) 30(-755.91,-460) 31(-724.41,-460) 32(-692.91,-460) 33(-661.42,-460) 34(-630,-460) 35(-598.43,-460) 36(-566.93,-460) 37(-535.43,-460) 38(-503.94,-460) 39(-472.44,-460) 40(-440.94,-460) 41(-409.45,-460) 42(-377.95,-460) 43(-346.46,-460) 44(-314.99,-460) 45(-283.46,-460) 46(-251.97,-460) 47(-220.47,-460) 48(-188.98,-460) 49(-157.48,-460) 50(-125.98,-460) 51(-94.49,-460) 52(-62.99,-460) 53(-31.5,-460) 54(0,-460)
  silkscreen extent -852,-460 40,0
VGA [mil]
  rect 68x68 hole 35: 1(0,0)
  round 68 hole 35: 2(0,-90) 3(0,-180) 4(0,-270) 5(0,-360) 6(100,45) 7(100,-45) 8(100,-135) 9(100,-225) 10(100,-315) 11(200,0) 12(200,-90) 13(200,-180) 14(200,-270) 15(200,-360)
  round 220 hole 125: 16(100,-662) 17(100,322)
  silkscreen extent -100,-785 759,445

## Part data
C1 C2 C3 C5 C19 C46 C50: library part "CAP NP_Dup2"
C4 C6 C7 C8 C9 C10 C11 C12 C13 C14 C15 C16 C17 C18 C20 C21 C22 C23 C24 C25 C26 C27 C28 C37 C44 C45 C47 C48 C49: library part C_Dup4
C29 C30 C31 C32 C33 C34 C35: library part C_Dup2
C36: library part C_Dup3
C38 C39 C40 C41 C42 C43: library part C_Dup1
CB1: library part "Circuit Breaker", "Circuit Breaker"
D1 D2 D3 D4: library part BAV99
EC1 EC2 EC3 EC4 EC5 EC6: library part EC
F1: library part "Fuse 2"
J1 J2: library part MHDR2X20, "Header, 20-Pin, Dual row"
J3: library part JTAG-10_Dup1
J4: library part "Connector 15", "Receptacle Assembly, 15-Pin, Sim Line Connector"
J5: "Header, 9-Pin, Dual row"
J6: library part MiniUSBB
K1 K2 K3 K4: library part KEYB
L1: library part INDUCTOR
LED0 LED1 LED2 LED3 LED5 LED6: library part LED_Dup1
LED7 LED8: library part LED
LS1: library part SPEAKER
P1 P2 P3 P4: library part "Header 2", "Header, 2-Pin"
Q1 Q2 Q3 Q4 Q5 Q6 Q7: library part PNP
R1 R30 R31 R41 R42 R43 R45 R47 R52: library part R
R2 R3 R75: library part RESISTOR
R4 R5 R7 R9 R10 R11 R12 R14 R32 R33 R34: library part R_Dup3
R6 R8 R15 R35 R36 R37 R38 R39 R40 R44 R46: library part R_Dup2
R13: library part R_Dup1
R23 R24: library part R_Dup6
R25 R26 R27: library part R_Dup5
RN1 RN2 RN3 RN4 RN5 RN6 RN7 RN8 RN9 RN11 RN12 RN13 RN15 RN17 RN18 RN20 RN21 RN22 RN23 RN24 RN25 RN26 RN27 RN28 RN29 RN30 RN31 RN32 RN33: library part RN_Dup1
RN10 RN14 RN16 RN19 RN34: library part RN
SW1: library part "SW KEY-DPDT"
U3: "Cyclone IV Family FPGA, 2V Core, 179 I/O Pins, 2 PLLs, 256-Pin FBGA, Speed Grade 8, Commercial Grade"
U4: library part CP2102_0
U5 U6: library part 1117-3.3
U8: "16 Mb (x1) Automotive Serial NOR Flash Memory, 75 MHz, 2.7 to 3.6 V, 8-pin SO8 Narrow (MN), Tube"
U9: library part HY57651620/SO_0
U11: library part DS1302_8SO
U12: library part 24LC04B_0
X1: library part OSC
Y1: library part ZTA

## Free pads (board coordinates)
  round 250 hole 130: 0(160,160) 1(4958.11,160) 2(4958.11,3388) 3(160,3388)

## Via types
v1: diameter 20, hole 10, Top Layer to Bottom Layer, 377 vias
v2: diameter 30, hole 15, Top Layer to Bottom Layer, 41 vias
v3: diameter 40, hole 20, Top Layer to Bottom Layer, 2 vias

## Nets (pads, with @x,y where several pads share a name; then routed paths per layer and width w, separated by ;. In a path a pad name is that pad's centre, name@x,y a point inside that pad or via, vN(x,y) a via of type N, cw(c..) or ccw(c..) an arc to the next point about the centre after c; other vN are vias at no path point)
_A2: J2.6 RN1.6 | length 788.1
  Top Layer w5: RN1.6@4646.15,2419.01 4688.01,2419.01 4841,2572 4950.65,2572 ; RN1.6@4661.76,2415.21 cw(c4670.94,2406.03) 4670.94,2419.01 cw(c4670.94,2431.98) RN1.6@4661.76,2422.81 ; J2.6@4969.54,2523.15 ccw(c4904.9,2526.24) 4950.66,2572 ; J2.6@4974.53,2522.92 ccw(c4920.15,2525.51) 4958.65,2564.01 ccw(c4997.14,2602.5) J2.6@4999.74,2548.12 ; J2.6@4979.52,2522.68 ccw(c4935.41,2524.78) 4966.64,2556.02 ccw(c4997.87,2587.25) J2.6@4999.98,2543.13 ; J2.6@4984.52,2522.44 ccw(c4950.66,2524.06) 4974.63,2548.02 ccw(c4998.6,2571.99) J2.6@5000.21,2538.13 ; J2.6@4999.5,2553.12 cw(c4996.41,2617.76) 4950.66,2572 ; J2.6@5001,2521.65 4950.65,2572
_A3: J2.8 RN2.8 | length 837.9
  Top Layer w5: RN2.8@4646.15,2316.62 4667.62,2316.62 ; RN2.8@4657.96,2312 ccw(c4657.96,2324.16) 4666.56,2315.56 ; RN2.8@4657.96,2317 ccw(c4657.96,2341.23) 4675.1,2324.1 ; RN2.8@4657.96,2322 ccw(c4657.96,2358.3) 4683.63,2332.63 ; RN2.8@4662.53,2313.79 cw(c4667.62,2310.62) 4667.62,2316.62 ; RN2.8@4662.53,2319.46 ccw(c4667.62,2322.63) 4667.62,2316.62 ; J2.8@4969.54,2423.15 ccw(c4904.9,2426.24) 4950.66,2472 ; J2.8@4974.53,2422.92 ccw(c4920.15,2425.51) 4958.65,2464.01 ccw(c4997.14,2502.5) J2.8@4999.74,2448.12 ; J2.8@4979.52,2422.68 ccw(c4935.41,2424.78) 4966.64,2456.02 ccw(c4997.87,2487.25) J2.8@4999.98,2443.13 ; J2.8@4984.52,2422.44 ccw(c4950.66,2424.06) 4974.63,2448.02 ccw(c4998.6,2471.99) J2.8@5000.21,2438.13 ; J2.8@4999.5,2453.12 cw(c4996.41,2517.76) 4950.66,2472 ; J2.8@5001,2421.65 4950.65,2472 ; 4667.62,2316.62 4823,2472 4950.65,2472
_A4: J2.10 RN2.6 | length 761.7
  Top Layer w5: RN2.6@4646.15,2253.63 4670.63,2253.63 ; RN2.6@4661.82,2249.9 cw(c4670.63,2241.38) 4670.63,2253.63 ; RN2.6@4661.82,2257.37 ccw(c4670.63,2265.88) 4670.63,2253.63 ; J2.10@4969.56,2323.63 ccw(c4908.14,2327.48) 4951.66,2371 ; J2.10@4974.55,2323.31 ccw(c4922.88,2326.55) 4959.49,2363.16 ccw(c4996.1,2399.78) J2.10@4999.34,2348.1 ; J2.10@4979.54,2323 ccw(c4937.62,2325.63) 4967.32,2355.33 ccw(c4997.02,2385.04) J2.10@4999.65,2343.11 ; J2.10@4984.53,2322.69 ccw(c4952.36,2324.7) 4975.15,2347.5 ccw(c4997.95,2370.3) J2.10@4999.97,2338.12 ; J2.10@4999.03,2353.09 cw(c4995.18,2414.52) 4951.66,2371 ; J2.10@5001,2321.65 4951.65,2371 ; 4670.63,2253.63 4788,2371 4951.65,2371
_A5: J2.12 RN3.8 | length 784.3
  Top Layer w5: RN3.8@4646.15,2151.25 4670.25,2151.25 ; RN3.8@4661.91,2147.6 cw(c4670.25,2139.89) 4670.25,2151.25 ; RN3.8@4661.91,2154.9 ccw(c4670.25,2162.61) 4670.25,2151.25 ; J2.12@4969.52,2222.7 ccw(c4901.62,2224.96) 4949.66,2273 ; J2.12@4974.51,2222.53 ccw(c4917.39,2224.43) 4957.81,2264.85 ccw(c4998.22,2305.26) J2.12@5000.12,2248.14 ; J2.12@4979.51,2222.37 ccw(c4933.17,2223.91) 4965.96,2256.7 ccw(c4998.74,2289.49) J2.12@5000.29,2243.14 ; J2.12@4984.51,2222.2 ccw(c4948.94,2223.38) 4974.11,2248.55 ccw(c4999.27,2273.71) J2.12@5000.45,2238.14 ; J2.12@4999.95,2253.14 cw(c4997.7,2321.04) 4949.66,2273 ; J2.12@5001,2221.65 4949.65,2273 ; 4670.25,2151.25 4792,2273 4949.65,2273
_A6: J2.14 RN3.6 | length 813.5
  Top Layer w5: RN3.6@4646.15,2088.26 4668.26,2088.26 ; RN3.6@4657.96,2083.63 ccw(c4657.96,2097.32) 4667.64,2087.64 ; RN3.6@4657.96,2088.63 ccw(c4657.96,2114.39) 4676.18,2096.18 ; RN3.6@4657.96,2093.63 ccw(c4657.96,2131.46) 4684.71,2104.71 ; RN3.6@4662.37,2085.18 cw(c4668.26,2081.08) 4668.26,2088.26 ; RN3.6@4662.37,2091.33 ccw(c4668.26,2095.43) 4668.26,2088.26 ; J2.14@4969.54,2123.15 ccw(c4904.9,2126.24) 4950.66,2172 ; J2.14@4974.53,2122.92 ccw(c4920.15,2125.51) 4958.65,2164.01 ccw(c4997.14,2202.5) J2.14@4999.74,2148.12 ; J2.14@4979.52,2122.68 ccw(c4935.41,2124.78) 4966.64,2156.02 ccw(c4997.87,2187.25) J2.14@4999.98,2143.13 ; J2.14@4984.52,2122.44 ccw(c4950.66,2124.06) 4974.63,2148.02 ccw(c4998.6,2171.99) J2.14@5000.21,2138.13 ; J2.14@4999.5,2153.12 cw(c4996.41,2217.76) 4950.66,2172 ; J2.14@5001,2121.65 4950.65,2172 ; 4668.26,2088.26 4752,2172 4950.65,2172
_A7: J2.16 RN4.8 | length 765.7
  Top Layer w5: RN4.8@4646.15,1985.88 4661.88,1985.88 4748,2072 4950.65,2072 ; RN4.8@4657.96,1986.25 ccw(c4657.96,1996.6) RN4.8@4665.28,1989.28 ; RN4.8@4657.96,1991.25 ccw(c4657.96,2013.67) 4673.82,1997.82 ; J2.16@4969.54,2023.15 ccw(c4904.9,2026.24) 4950.66,2072 ; J2.16@4974.53,2022.92 ccw(c4920.15,2025.51) 4958.65,2064.01 ccw(c4997.14,2102.5) J2.16@4999.74,2048.12 ; J2.16@4979.52,2022.68 ccw(c4935.41,2024.78) 4966.64,2056.02 ccw(c4997.87,2087.25) J2.16@4999.98,2043.13 ; J2.16@4984.52,2022.44 ccw(c4950.66,2024.06) 4974.63,2048.02 ccw(c4998.6,2071.99) J2.16@5000.21,2038.13 ; J2.16@4999.5,2053.12 cw(c4996.41,2117.76) 4950.66,2072 ; J2.16@5001,2021.65 4950.65,2072
_A8: J2.18 RN4.6 | length 758
  Top Layer w5: RN4.6@4646.15,1922.88 4663.88,1922.88 4713,1972 4950.65,1972 ; RN4.6@4657.96,1923.26 ccw(c4657.96,1938.46) 4668.71,1927.71 ; RN4.6@4657.96,1928.26 ccw(c4657.96,1955.53) 4677.24,1936.24 ; J2.18@4969.54,1923.15 ccw(c4904.9,1926.24) 4950.66,1972 ; J2.18@4974.53,1922.92 ccw(c4920.15,1925.51) 4958.65,1964.01 ccw(c4997.14,2002.5) J2.18@4999.74,1948.12 ; J2.18@4979.52,1922.68 ccw(c4935.41,1924.78) 4966.64,1956.02 ccw(c4997.87,1987.25) J2.18@4999.98,1943.13 ; J2.18@4984.52,1922.44 ccw(c4950.66,1924.06) 4974.63,1948.02 ccw(c4998.6,1971.99) J2.18@5000.21,1938.13 ; J2.18@4999.5,1953.12 cw(c4996.41,2017.76) 4950.66,1972 ; J2.18@5001,1921.65 4950.65,1972
_A9: J2.20 RN5.8 | length 776.4
  Top Layer w5: RN5.8@4646.15,1820.5 4665.5,1820.5 4718,1873 4949.65,1873 ; RN5.8@4657.96,1820.87 ccw(c4657.96,1839.98) 4671.47,1826.47 ; RN5.8@4657.96,1825.87 ccw(c4657.96,1857.05) 4680,1835 ; J2.20@4969.52,1822.7 ccw(c4901.62,1824.96) 4949.66,1873 ; J2.20@4974.51,1822.53 ccw(c4917.39,1824.43) 4957.81,1864.85 ccw(c4998.22,1905.26) J2.20@5000.12,1848.14 ; J2.20@4979.51,1822.37 ccw(c4933.17,1823.91) 4965.96,1856.7 ccw(c4998.74,1889.49) J2.20@5000.29,1843.14 ; J2.20@4984.51,1822.2 ccw(c4948.94,1823.38) 4974.11,1848.55 ccw(c4999.27,1873.71) J2.20@5000.45,1838.14 ; J2.20@4999.95,1853.14 cw(c4997.7,1921.04) 4949.66,1873 ; J2.20@5001,1821.65 4949.65,1873
_A10: J2.22 RN5.6 | length 685.2
  Top Layer w5: RN5.6@4646.15,1757.51 4853.51,1757.51 4864,1768 4954.65,1768 ; RN5.6@4661.76,1753.71 cw(c4670.94,1744.53) 4670.94,1757.51 cw(c4670.94,1770.48) RN5.6@4661.76,1761.31 ; J2.22@4969.69,1725.13 ccw(c4917.58,1730.92) 4954.66,1768 ; J2.22@4974.66,1724.58 ccw(c4930.82,1729.45) 4962.01,1760.64 ccw(c4993.2,1791.83) J2.22@4998.07,1747.99 ; J2.22@4979.63,1724.03 ccw(c4944.06,1727.98) 4969.37,1753.29 ccw(c4994.67,1778.59) J2.22@4998.63,1743.02 ; J2.22@4984.6,1723.48 ccw(c4957.3,1726.51) 4976.72,1745.93 ccw(c4996.15,1765.35) J2.22@4999.18,1738.05 ; J2.22@4997.52,1752.96 cw(c4991.73,1805.08) 4954.66,1768 ; J2.22@5001,1721.65 4954.65,1768
_A11: J2.24 RN6.8 | length 709
  Top Layer w5: RN6.8@4646.15,1655.12 4844.12,1655.12 4859,1670 4952.65,1670 ; RN6.8@4661.76,1651.33 cw(c4670.94,1642.15) 4670.94,1655.12 cw(c4670.94,1668.1) RN6.8@4661.76,1658.92 ; J2.24@4969.6,1624.11 ccw(c4911.33,1628.67) 4952.66,1670 ; J2.24@4974.58,1623.72 ccw(c4925.56,1627.56) 4960.33,1662.32 ccw(c4995.1,1697.09) J2.24@4998.93,1648.07 ; J2.24@4979.57,1623.33 ccw(c4939.79,1626.44) 4968,1654.65 ccw(c4996.21,1682.86) J2.24@4999.32,1643.09 ; J2.24@4984.55,1622.94 ccw(c4954.03,1625.33) 4975.68,1646.98 ccw(c4997.32,1668.62) J2.24@4999.71,1638.1 ; J2.24@4998.54,1653.06 cw(c4993.98,1711.33) 4952.66,1670 ; J2.24@5001,1621.65 4952.65,1670
_A12: J2.26 RN6.6 | length 743.4
  Top Layer w5: RN6.6@4646.15,1592.13 4660.87,1592.13 4680,1573 4949.65,1573 ; RN6.6@4657.96,1586.76 cw(c4657.96,1566.77) 4672.1,1580.9 ; RN6.6@4663.34,1592.13 ccw(c4669.29,1592.13) RN6.6@4665.08,1587.92 ; J2.26@4969.52,1522.7 ccw(c4901.62,1524.96) 4949.66,1573 ; J2.26@4974.51,1522.53 ccw(c4917.39,1524.43) 4957.81,1564.85 ccw(c4998.22,1605.26) J2.26@5000.12,1548.14 ; J2.26@4979.51,1522.37 ccw(c4933.17,1523.91) 4965.96,1556.7 ccw(c4998.74,1589.49) J2.26@5000.29,1543.14 ; J2.26@4984.51,1522.2 ccw(c4948.94,1523.38) 4974.11,1548.55 ccw(c4999.27,1573.71) J2.26@5000.45,1538.14 ; J2.26@4999.95,1553.14 cw(c4997.7,1621.04) 4949.66,1573 ; J2.26@5001,1521.65 4949.65,1573
_A13: J2.28 RN7.8 | length 742.4
  Top Layer w5: RN7.8@4646.15,1489.75 4698.25,1489.75 4715,1473 4949.65,1473 ; RN7.8@4661.76,1485.95 cw(c4670.94,1476.78) 4670.94,1489.75 cw(c4670.94,1502.72) RN7.8@4661.76,1493.55 ; J2.28@4969.52,1422.7 ccw(c4901.62,1424.96) 4949.66,1473 ; J2.28@4974.51,1422.53 ccw(c4917.39,1424.43) 4957.81,1464.85 ccw(c4998.22,1505.26) J2.28@5000.12,1448.14 ; J2.28@4979.51,1422.37 ccw(c4933.17,1423.91) 4965.96,1456.7 ccw(c4998.74,1489.49) J2.28@5000.29,1443.14 ; J2.28@4984.51,1422.2 ccw(c4948.94,1423.38) 4974.11,1448.55 ccw(c4999.27,1473.71) J2.28@5000.45,1438.14 ; J2.28@4999.95,1453.14 cw(c4997.7,1521.04) 4949.66,1473 ; J2.28@5001,1421.65 4949.65,1473
_B1: J2.3 RN1.7 | length 484.3
  Top Layer w5: RN1.7@4646.15,2450.5 4679.5,2450.5 4850.65,2621.65 ; RN1.7@4661.76,2446.7 cw(c4670.94,2437.53) 4670.94,2450.5 cw(c4670.94,2463.48) RN1.7@4661.76,2454.3 ; J2.3@4872.67,2607.88 ccw(c4850.65,2597.17) 4850.65,2621.65 ; J2.3@4872.67,2635.43 cw(c4850.65,2646.14) 4850.65,2621.65 ; J2.3@4877.17,2610.06 ccw(c4858.65,2601.06) 4858.65,2621.65 ccw(c4858.65,2642.25) J2.3@4877.17,2633.24 ; J2.3@4881.66,2612.25 ccw(c4866.64,2604.94) 4866.64,2621.65 ccw(c4866.64,2638.36) J2.3@4881.66,2631.06 ; J2.3@4901,2621.65 4850.65,2621.65
_B3: J2.5 RN1.5 | length 615.7
  Top Layer w5: RN1.5@4646.15,2387.51 4701.51,2387.51 4835.65,2521.65 ; RN1.5@4661.76,2383.71 cw(c4670.94,2374.54) 4670.94,2387.51 cw(c4670.94,2400.49) RN1.5@4661.76,2391.31 ; J2.5@4876.36,2502.03 ccw(c4835.66,2469.63) 4835.66,2521.65 ; J2.5@4876.36,2541.27 cw(c4835.66,2573.68) 4835.66,2521.65 ; J2.5@4880.27,2505.15 ccw(c4846.03,2477.89) 4846.03,2521.65 ccw(c4846.03,2565.42) J2.5@4880.27,2538.16 ; J2.5@4884.18,2508.26 ccw(c4856.4,2486.14) 4856.4,2521.65 ccw(c4856.4,2557.16) J2.5@4884.18,2535.05 ; J2.5@4888.09,2511.38 ccw(c4866.77,2494.4) 4866.77,2521.65 ccw(c4866.77,2548.9) J2.5@4888.09,2531.93 ; J2.5@4901,2521.65 4835.65,2521.65
_B4: J2.7 RN2.7 | length 748.9
  Top Layer w5: RN2.7@4646.15,2285.13 4668.13,2285.13 ; RN2.7@4657.96,2280.5 ccw(c4657.96,2293.88) 4667.42,2284.42 ; RN2.7@4657.96,2285.5 ccw(c4657.96,2310.95) 4675.96,2292.96 ; RN2.7@4657.96,2290.5 ccw(c4657.96,2328.02) 4684.49,2301.49 ; RN2.7@4662.4,2282.1 cw(c4668.13,2278.2) 4668.13,2285.13 ; RN2.7@4662.4,2288.16 ccw(c4668.13,2292.06) 4668.13,2285.13 ; J2.7@4878.73,2399.38 ccw(c4824.95,2345.61) 4824.95,2421.65 ccw(c4824.95,2497.7) J2.7@4878.73,2443.93 ; J2.7@4882.26,2402.92 ccw(c4837.02,2357.68) 4837.02,2421.65 ccw(c4837.02,2485.63) J2.7@4882.26,2440.39 ; J2.7@4885.8,2406.45 ccw(c4849.09,2369.75) 4849.09,2421.65 ccw(c4849.09,2473.56) J2.7@4885.8,2436.86 ; J2.7@4889.33,2409.99 ccw(c4861.17,2381.82) 4861.17,2421.65 ccw(c4861.17,2461.49) J2.7@4889.33,2433.32 ; J2.7@4901,2421.65 4804.65,2421.65 4668.13,2285.13
_B5: J2.9 RN2.5 | length 676.1
  Top Layer w5: RN2.5@4646.15,2222.14 4669.14,2222.14 ; RN2.5@4662.16,2218.78 cw(c4669.14,2213.2) 4669.14,2222.14 ; RN2.5@4662.16,2225.49 ccw(c4669.14,2231.07) 4669.14,2222.14 ; J2.9@4878.73,2299.38 ccw(c4824.95,2245.61) 4824.95,2321.65 ccw(c4824.95,2397.7) J2.9@4878.73,2343.93 ; J2.9@4882.26,2302.92 ccw(c4837.02,2257.68) 4837.02,2321.65 ccw(c4837.02,2385.63) J2.9@4882.26,2340.39 ; J2.9@4885.8,2306.45 ccw(c4849.09,2269.75) 4849.09,2321.65 ccw(c4849.09,2373.56) J2.9@4885.8,2336.86 ; J2.9@4889.33,2309.99 ccw(c4861.17,2281.82) 4861.17,2321.65 ccw(c4861.17,2361.49) J2.9@4889.33,2333.32 ; J2.9@4901,2321.65 4768.65,2321.65 4669.14,2222.14
_B6: J2.11 RN3.7 | length 715.2
  Top Layer w5: RN3.7@4646.15,2119.75 4666.75,2119.75 ; RN3.7@4657.96,2120.13 ccw(c4657.96,2142.26) 4673.61,2126.61 ; RN3.7@4657.96,2125.13 ccw(c4657.96,2159.33) 4682.15,2135.15 ; RN3.7@4662.74,2117.3 cw(c4666.75,2115.25) 4666.75,2119.75 ; RN3.7@4662.74,2122.2 ccw(c4666.75,2124.26) 4666.75,2119.75 ; J2.11@4878.73,2199.38 ccw(c4824.95,2145.61) 4824.95,2221.65 ccw(c4824.95,2297.7) J2.11@4878.73,2243.93 ; J2.11@4882.26,2202.92 ccw(c4837.02,2157.68) 4837.02,2221.65 ccw(c4837.02,2285.63) J2.11@4882.26,2240.39 ; J2.11@4885.8,2206.45 ccw(c4849.09,2169.75) 4849.09,2221.65 ccw(c4849.09,2273.56) J2.11@4885.8,2236.86 ; J2.11@4889.33,2209.99 ccw(c4861.17,2181.82) 4861.17,2221.65 ccw(c4861.17,2261.49) J2.11@4889.33,2233.32 ; J2.11@4901,2221.65 4768.65,2221.65 4666.75,2119.75
_B7: J2.13 RN3.5 | length 686.3
  Top Layer w5: RN3.5@4646.15,2056.76 4665.76,2056.76 4730.65,2121.65 J2.13@4901,2121.65 ; RN3.5@4657.96,2057.14 ccw(c4657.96,2076.87) 4671.92,2062.92 ; RN3.5@4657.96,2062.14 ccw(c4657.96,2093.94) 4680.45,2071.45 ; J2.13@4878.73,2099.38 ccw(c4824.95,2045.61) 4824.95,2121.65 ccw(c4824.95,2197.7) J2.13@4878.73,2143.93 ; J2.13@4882.26,2102.92 ccw(c4837.02,2057.68) 4837.02,2121.65 ccw(c4837.02,2185.63) J2.13@4882.26,2140.39 ; J2.13@4885.8,2106.45 ccw(c4849.09,2069.75) 4849.09,2121.65 ccw(c4849.09,2173.56) J2.13@4885.8,2136.86 ; J2.13@4889.33,2109.99 ccw(c4861.17,2081.82) 4861.17,2121.65 ccw(c4861.17,2161.49) J2.13@4889.33,2133.32
_B8: J2.15 RN4.7 | length 681.1
  Top Layer w5: RN4.7@4646.15,1954.38 4664.38,1954.38 4731,2021 J2.15@4900.35,2021 ; RN4.7@4657.96,1954.75 ccw(c4657.96,1971.15) 4669.56,1959.56 ; RN4.7@4657.96,1959.75 ccw(c4657.96,1988.22) 4678.09,1968.09 ; 4823.37,2021 ccw(c4823.37,2099.28) J2.15@4878.73,2043.93 ; 4826.53,2021 cw(c4826.53,1947.18) J2.15@4878.73,1999.38 ; 4835.45,2021 ccw(c4835.45,2087.21) J2.15@4882.26,2040.39 ; 4838.6,2021 cw(c4838.6,1959.25) J2.15@4882.26,2002.92 ; 4847.52,2021 ccw(c4847.52,2075.14) J2.15@4885.8,2036.86 ; 4850.67,2021 cw(c4850.67,1971.33) J2.15@4885.8,2006.45 ; 4859.59,2021 ccw(c4859.59,2063.07) J2.15@4889.33,2033.32 ; 4862.74,2021 cw(c4862.74,1983.4) J2.15@4889.33,2009.99
_B9: J2.17 RN4.5 | length 648.1
  Top Layer w5: RN4.5@4646.15,1891.39 4669.39,1891.39 ; RN4.5@4662.1,1887.96 cw(c4669.39,1881.93) 4669.39,1891.39 ; RN4.5@4662.1,1894.81 ccw(c4669.39,1900.84) 4669.39,1891.39 ; J2.17@4878.73,1899.38 ccw(c4824.95,1845.61) 4824.95,1921.65 ccw(c4824.95,1997.7) J2.17@4878.73,1943.93 ; J2.17@4882.26,1902.92 ccw(c4837.02,1857.68) 4837.02,1921.65 ccw(c4837.02,1985.63) J2.17@4882.26,1940.39 ; J2.17@4885.8,1906.45 ccw(c4849.09,1869.75) 4849.09,1921.65 ccw(c4849.09,1973.56) J2.17@4885.8,1936.86 ; J2.17@4889.33,1909.99 ccw(c4861.17,1881.82) 4861.17,1921.65 ccw(c4861.17,1961.49) J2.17@4889.33,1933.32 ; J2.17@4901,1921.65 4699.65,1921.65 4669.39,1891.39
_B10: J2.19 RN5.7 | length 658.7
  Top Layer w5: RN5.7@4646.15,1789 4662,1789 4694.65,1821.65 J2.19@4901,1821.65 ; RN5.7@4657.96,1789.38 ccw(c4657.96,1800.04) RN5.7@4665.5,1792.5 ; RN5.7@4657.96,1794.38 ccw(c4657.96,1817.11) 4674.04,1801.04 ; J2.19@4878.73,1799.38 ccw(c4824.95,1745.61) 4824.95,1821.65 ccw(c4824.95,1897.7) J2.19@4878.73,1843.93 ; J2.19@4882.26,1802.92 ccw(c4837.02,1757.68) 4837.02,1821.65 ccw(c4837.02,1885.63) J2.19@4882.26,1840.39 ; J2.19@4885.8,1806.45 ccw(c4849.09,1769.75) 4849.09,1821.65 ccw(c4849.09,1873.56) J2.19@4885.8,1836.86 ; J2.19@4889.33,1809.99 ccw(c4861.17,1781.82) 4861.17,1821.65 ccw(c4861.17,1861.49) J2.19@4889.33,1833.32
_B11: J2.21 RN5.5 | length 648.8
  Top Layer w5: RN5.5@4646.15,1726.01 J2.21@4896.64,1726.01 ; RN5.5@4661.76,1722.21 cw(c4670.94,1713.04) 4670.94,1726.01 cw(c4670.94,1738.99) RN5.5@4661.76,1729.81 ; 4814.43,1726.01 cw(c4814.43,1635.08) J2.21@4878.73,1699.38 ; 4826.5,1726.01 cw(c4826.5,1647.15) J2.21@4882.26,1702.92 ; 4835.47,1726.01 ccw(c4835.47,1787.18) J2.21@4878.73,1743.93 ; 4838.57,1726.01 cw(c4838.57,1659.23) J2.21@4885.8,1706.45 ; 4847.55,1726.01 ccw(c4847.55,1775.11) J2.21@4882.26,1740.39 ; 4850.64,1726.01 cw(c4850.64,1671.3) J2.21@4889.33,1709.99 ; 4859.62,1726.01 ccw(c4859.62,1763.04) J2.21@4885.8,1736.86 ; 4862.71,1726.01 cw(c4862.71,1683.37) J2.21@4892.87,1713.52
_B12: J2.23 RN6.7 | length 637.3
  Top Layer w5: RN6.7@4646.15,1623.63 J2.23@4899.02,1623.63 ; RN6.7@4661.76,1619.83 cw(c4670.94,1610.65) 4670.94,1623.63 cw(c4670.94,1636.6) RN6.7@4661.76,1627.43 ; 4820.18,1623.63 cw(c4820.18,1540.84) J2.23@4878.73,1599.38 ; 4829.72,1623.63 ccw(c4829.72,1692.93) J2.23@4878.73,1643.93 ; 4832.25,1623.63 cw(c4832.25,1552.91) J2.23@4882.26,1602.92 ; 4841.79,1623.63 ccw(c4841.79,1680.86) J2.23@4882.26,1640.39 ; 4844.33,1623.63 cw(c4844.33,1564.98) J2.23@4885.8,1606.45 ; 4853.86,1623.63 ccw(c4853.86,1668.79) J2.23@4885.8,1636.86 ; 4856.4,1623.63 cw(c4856.4,1577.05) J2.23@4889.33,1609.99 ; 4865.93,1623.63 ccw(c4865.93,1656.72) J2.23@4889.33,1633.32
_B13: J2.25 RN6.5 | length 655.4
  Top Layer w5: RN6.5@4646.15,1560.64 4659.36,1560.64 4698.35,1521.65 J2.25@4901,1521.65 ; RN6.5@4657.96,1555.26 cw(c4657.96,1538.9) 4669.53,1550.47 ; RN6.5@4663.33,1560.64 ccw(c4672.92,1560.64) 4666.14,1553.86 ; J2.25@4878.73,1499.38 ccw(c4824.95,1445.61) 4824.95,1521.65 ccw(c4824.95,1597.7) J2.25@4878.73,1543.93 ; J2.25@4882.26,1502.92 ccw(c4837.02,1457.68) 4837.02,1521.65 ccw(c4837.02,1585.63) J2.25@4882.26,1540.39 ; J2.25@4885.8,1506.45 ccw(c4849.09,1469.75) 4849.09,1521.65 ccw(c4849.09,1573.56) J2.25@4885.8,1536.86 ; J2.25@4889.33,1509.99 ccw(c4861.17,1481.82) 4861.17,1521.65 ccw(c4861.17,1561.49) J2.25@4889.33,1533.32
_C2: J2.4 RN1.8 | length 764.6
  Top Layer w5: RN1.8@4646.15,2482 4669,2482 ; RN1.8@4662.19,2478.69 cw(c4669,2473.35) 4669,2482 ; RN1.8@4662.19,2485.31 ccw(c4669,2490.65) 4669,2482 ; J2.4@4969.64,2624.61 ccw(c4914.48,2629.82) 4953.66,2669 ; J2.4@4974.62,2624.14 ccw(c4928.21,2628.52) 4961.17,2661.48 ccw(c4994.13,2694.44) J2.4@4998.51,2648.04 ; J2.4@4979.6,2623.67 ccw(c4941.94,2627.23) 4968.69,2653.97 ccw(c4995.43,2680.71) J2.4@4998.98,2643.06 ; J2.4@4984.57,2623.2 ccw(c4955.68,2625.93) 4976.2,2646.45 ccw(c4996.72,2666.97) J2.4@4999.45,2638.08 ; J2.4@4998.04,2653.01 cw(c4992.83,2708.18) 4953.66,2669 ; J2.4@5001,2621.65 4953.65,2669 ; 4669,2482 4856,2669 4953.65,2669
_C6: J2.29 RN7.5 | length 669.8
  Top Layer w5: RN7.5@4646.15,1395.26 4678.74,1395.26 4752.35,1321.65 J2.29@4901,1321.65 ; RN7.5@4661.76,1391.46 cw(c4670.94,1382.29) 4670.94,1395.26 cw(c4670.94,1408.24) RN7.5@4661.76,1399.06 ; J2.29@4878.73,1299.38 ccw(c4824.95,1245.61) 4824.95,1321.65 ccw(c4824.95,1397.7) J2.29@4878.73,1343.93 ; J2.29@4882.26,1302.92 ccw(c4837.02,1257.68) 4837.02,1321.65 ccw(c4837.02,1385.63) J2.29@4882.26,1340.39 ; J2.29@4885.8,1306.45 ccw(c4849.09,1269.75) 4849.09,1321.65 ccw(c4849.09,1373.56) J2.29@4885.8,1336.86 ; J2.29@4889.33,1309.99 ccw(c4861.17,1281.82) 4861.17,1321.65 ccw(c4861.17,1361.49) J2.29@4889.33,1333.32
_C8: J2.34 RN8.6 | length 781.7
  Top Layer w5: RN8.6@4646.15,1261.38 4670.62,1261.38 ; RN8.6@4661.83,1257.65 cw(c4670.62,1249.17) 4670.62,1261.38 ; RN8.6@4661.83,1265.11 ccw(c4670.62,1273.6) 4670.62,1261.38 ; J2.34@4969.51,1122.26 ccw(c4898.29,1123.63) 4948.66,1174 ; J2.34@4974.5,1122.16 ccw(c4914.59,1123.32) 4956.96,1165.69 ccw(c4999.34,1208.06) J2.34@5000.49,1148.15 ; J2.34@4979.5,1122.07 ccw(c4930.89,1123) 4965.27,1157.38 ccw(c4999.65,1191.76) J2.34@5000.59,1143.15 ; J2.34@4984.5,1121.97 ccw(c4947.2,1122.69) 4973.58,1149.07 ccw(c4999.97,1175.46) J2.34@5000.68,1138.15 ; J2.34@5000.39,1153.15 cw(c4999.02,1224.37) 4948.66,1174 ; J2.34@5001,1121.65 4948.65,1174 ; 4670.62,1261.38 4758,1174 4948.65,1174
_D5: J2.27 RN7.7 | length 654.4
  Top Layer w5: RN7.7@4646.15,1458.25 4695.75,1458.25 4732.35,1421.65 J2.27@4901,1421.65 ; RN7.7@4661.76,1454.45 cw(c4670.94,1445.28) 4670.94,1458.25 cw(c4670.94,1471.23) RN7.7@4661.76,1462.05 ; J2.27@4878.73,1399.38 ccw(c4824.95,1345.61) 4824.95,1421.65 ccw(c4824.95,1497.7) J2.27@4878.73,1443.93 ; J2.27@4882.26,1402.92 ccw(c4837.02,1357.68) 4837.02,1421.65 ccw(c4837.02,1485.63) J2.27@4882.26,1440.39 ; J2.27@4885.8,1406.45 ccw(c4849.09,1369.75) 4849.09,1421.65 ccw(c4849.09,1473.56) J2.27@4885.8,1436.86 ; J2.27@4889.33,1409.99 ccw(c4861.17,1381.82) 4861.17,1421.65 ccw(c4861.17,1461.49) J2.27@4889.33,1433.32
_D6: J2.30 RN7.6 | length 747.4
  Top Layer w5: RN7.6@4646.15,1426.76 4691.24,1426.76 4746,1372 4950.65,1372 ; RN7.6@4661.76,1422.96 cw(c4670.94,1413.78) 4670.94,1426.76 cw(c4670.94,1439.73) RN7.6@4661.76,1430.56 ; J2.30@4969.54,1323.15 ccw(c4904.9,1326.24) 4950.66,1372 ; J2.30@4974.53,1322.92 ccw(c4920.15,1325.51) 4958.65,1364.01 ccw(c4997.14,1402.5) J2.30@4999.74,1348.12 ; J2.30@4979.52,1322.68 ccw(c4935.41,1324.78) 4966.64,1356.02 ccw(c4997.87,1387.25) J2.30@4999.98,1343.13 ; J2.30@4984.52,1322.44 ccw(c4950.66,1324.06) 4974.63,1348.02 ccw(c4998.6,1371.99) J2.30@5000.21,1338.13 ; J2.30@4999.5,1353.12 cw(c4996.41,1417.76) 4950.66,1372 ; J2.30@5001,1321.65 4950.65,1372
_D8: J2.33 RN8.5 | length 698
  Top Layer w5: RN8.5@4646.15,1229.89 4664.11,1229.89 4772.35,1121.65 J2.33@4901,1121.65 ; RN8.5@4657.96,1224.51 cw(c4657.96,1196.69) 4677.64,1216.36 ; RN8.5@4657.96,1229.51 cw(c4657.96,1213.76) 4669.1,1224.9 ; J2.33@4878.73,1099.38 ccw(c4824.95,1045.61) 4824.95,1121.65 ccw(c4824.95,1197.7) J2.33@4878.73,1143.93 ; J2.33@4882.26,1102.92 ccw(c4837.02,1057.68) 4837.02,1121.65 ccw(c4837.02,1185.63) J2.33@4882.26,1140.39 ; J2.33@4885.8,1106.45 ccw(c4849.09,1069.75) 4849.09,1121.65 ccw(c4849.09,1173.56) J2.33@4885.8,1136.86 ; J2.33@4889.33,1109.99 ccw(c4861.17,1081.82) 4861.17,1121.65 ccw(c4861.17,1161.49) J2.33@4889.33,1133.32
_E7: J2.32 RN8.8 | length 735.9
  Top Layer w5: RN8.8@4646.15,1324.38 4688.62,1324.38 4742,1271 4951.65,1271 ; RN8.8@4661.76,1320.58 cw(c4670.94,1311.4) 4670.94,1324.38 cw(c4670.94,1337.35) RN8.8@4661.76,1328.17 ; J2.32@4969.56,1223.63 ccw(c4908.14,1227.48) 4951.66,1271 ; J2.32@4974.55,1223.31 ccw(c4922.88,1226.55) 4959.49,1263.16 ccw(c4996.1,1299.78) J2.32@4999.34,1248.1 ; J2.32@4979.54,1223 ccw(c4937.62,1225.63) 4967.32,1255.33 ccw(c4997.02,1285.04) J2.32@4999.65,1243.11 ; J2.32@4984.53,1222.69 ccw(c4952.36,1224.7) 4975.15,1247.5 ccw(c4997.95,1270.3) J2.32@4999.97,1238.12 ; J2.32@4999.03,1253.09 cw(c4995.18,1314.52) 4951.66,1271 ; J2.32@5001,1221.65 4951.65,1271